# Altium PCB ATLAS_XP2V6.PcbDoc (part 1 of 4)
Units mil, origin at the board's own origin, x right, y up, seen from the top; angles counter-clockwise.
Board outline 6380 x 9190 mil, 4 copper layers (Primary Component Side, Ground Plane, Power Plane, Secondary Component Side), stack 35.4 mil thick; 203 components, 228 nets, 1212 pads, 912 vias.
Unrouted connection lines stored in the file: 522.
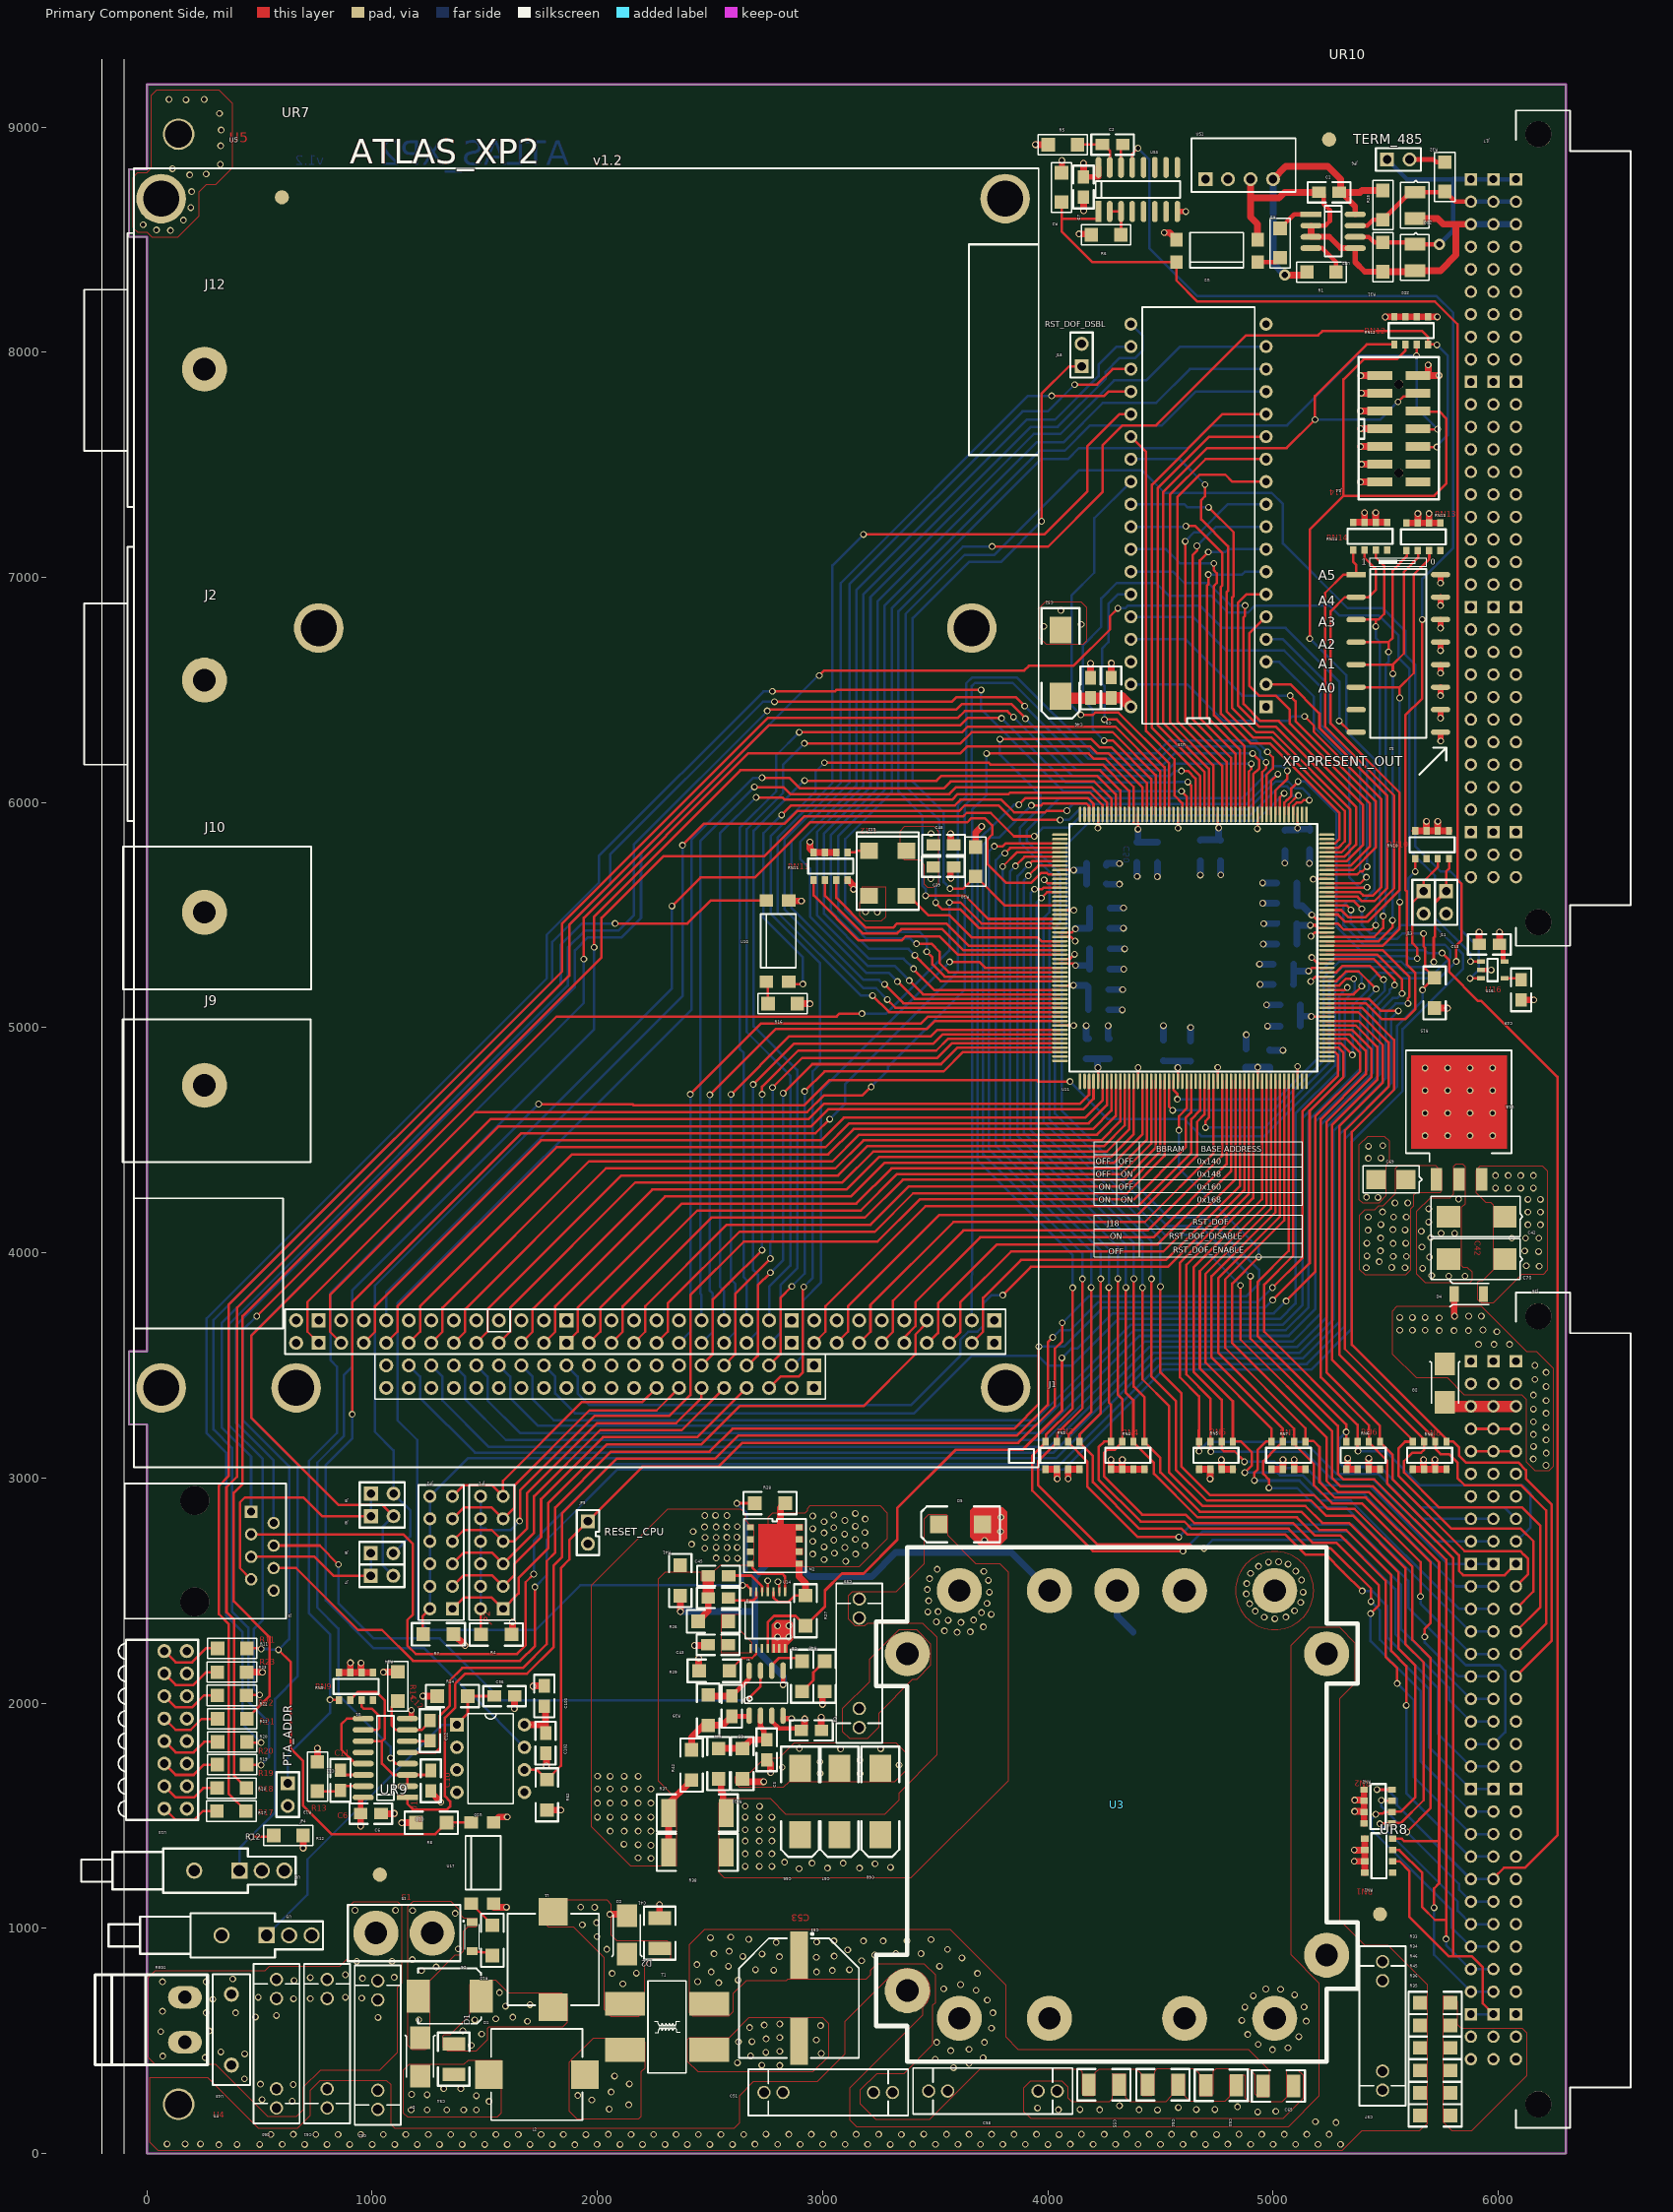
[diagram p0: Primary Component Side view]
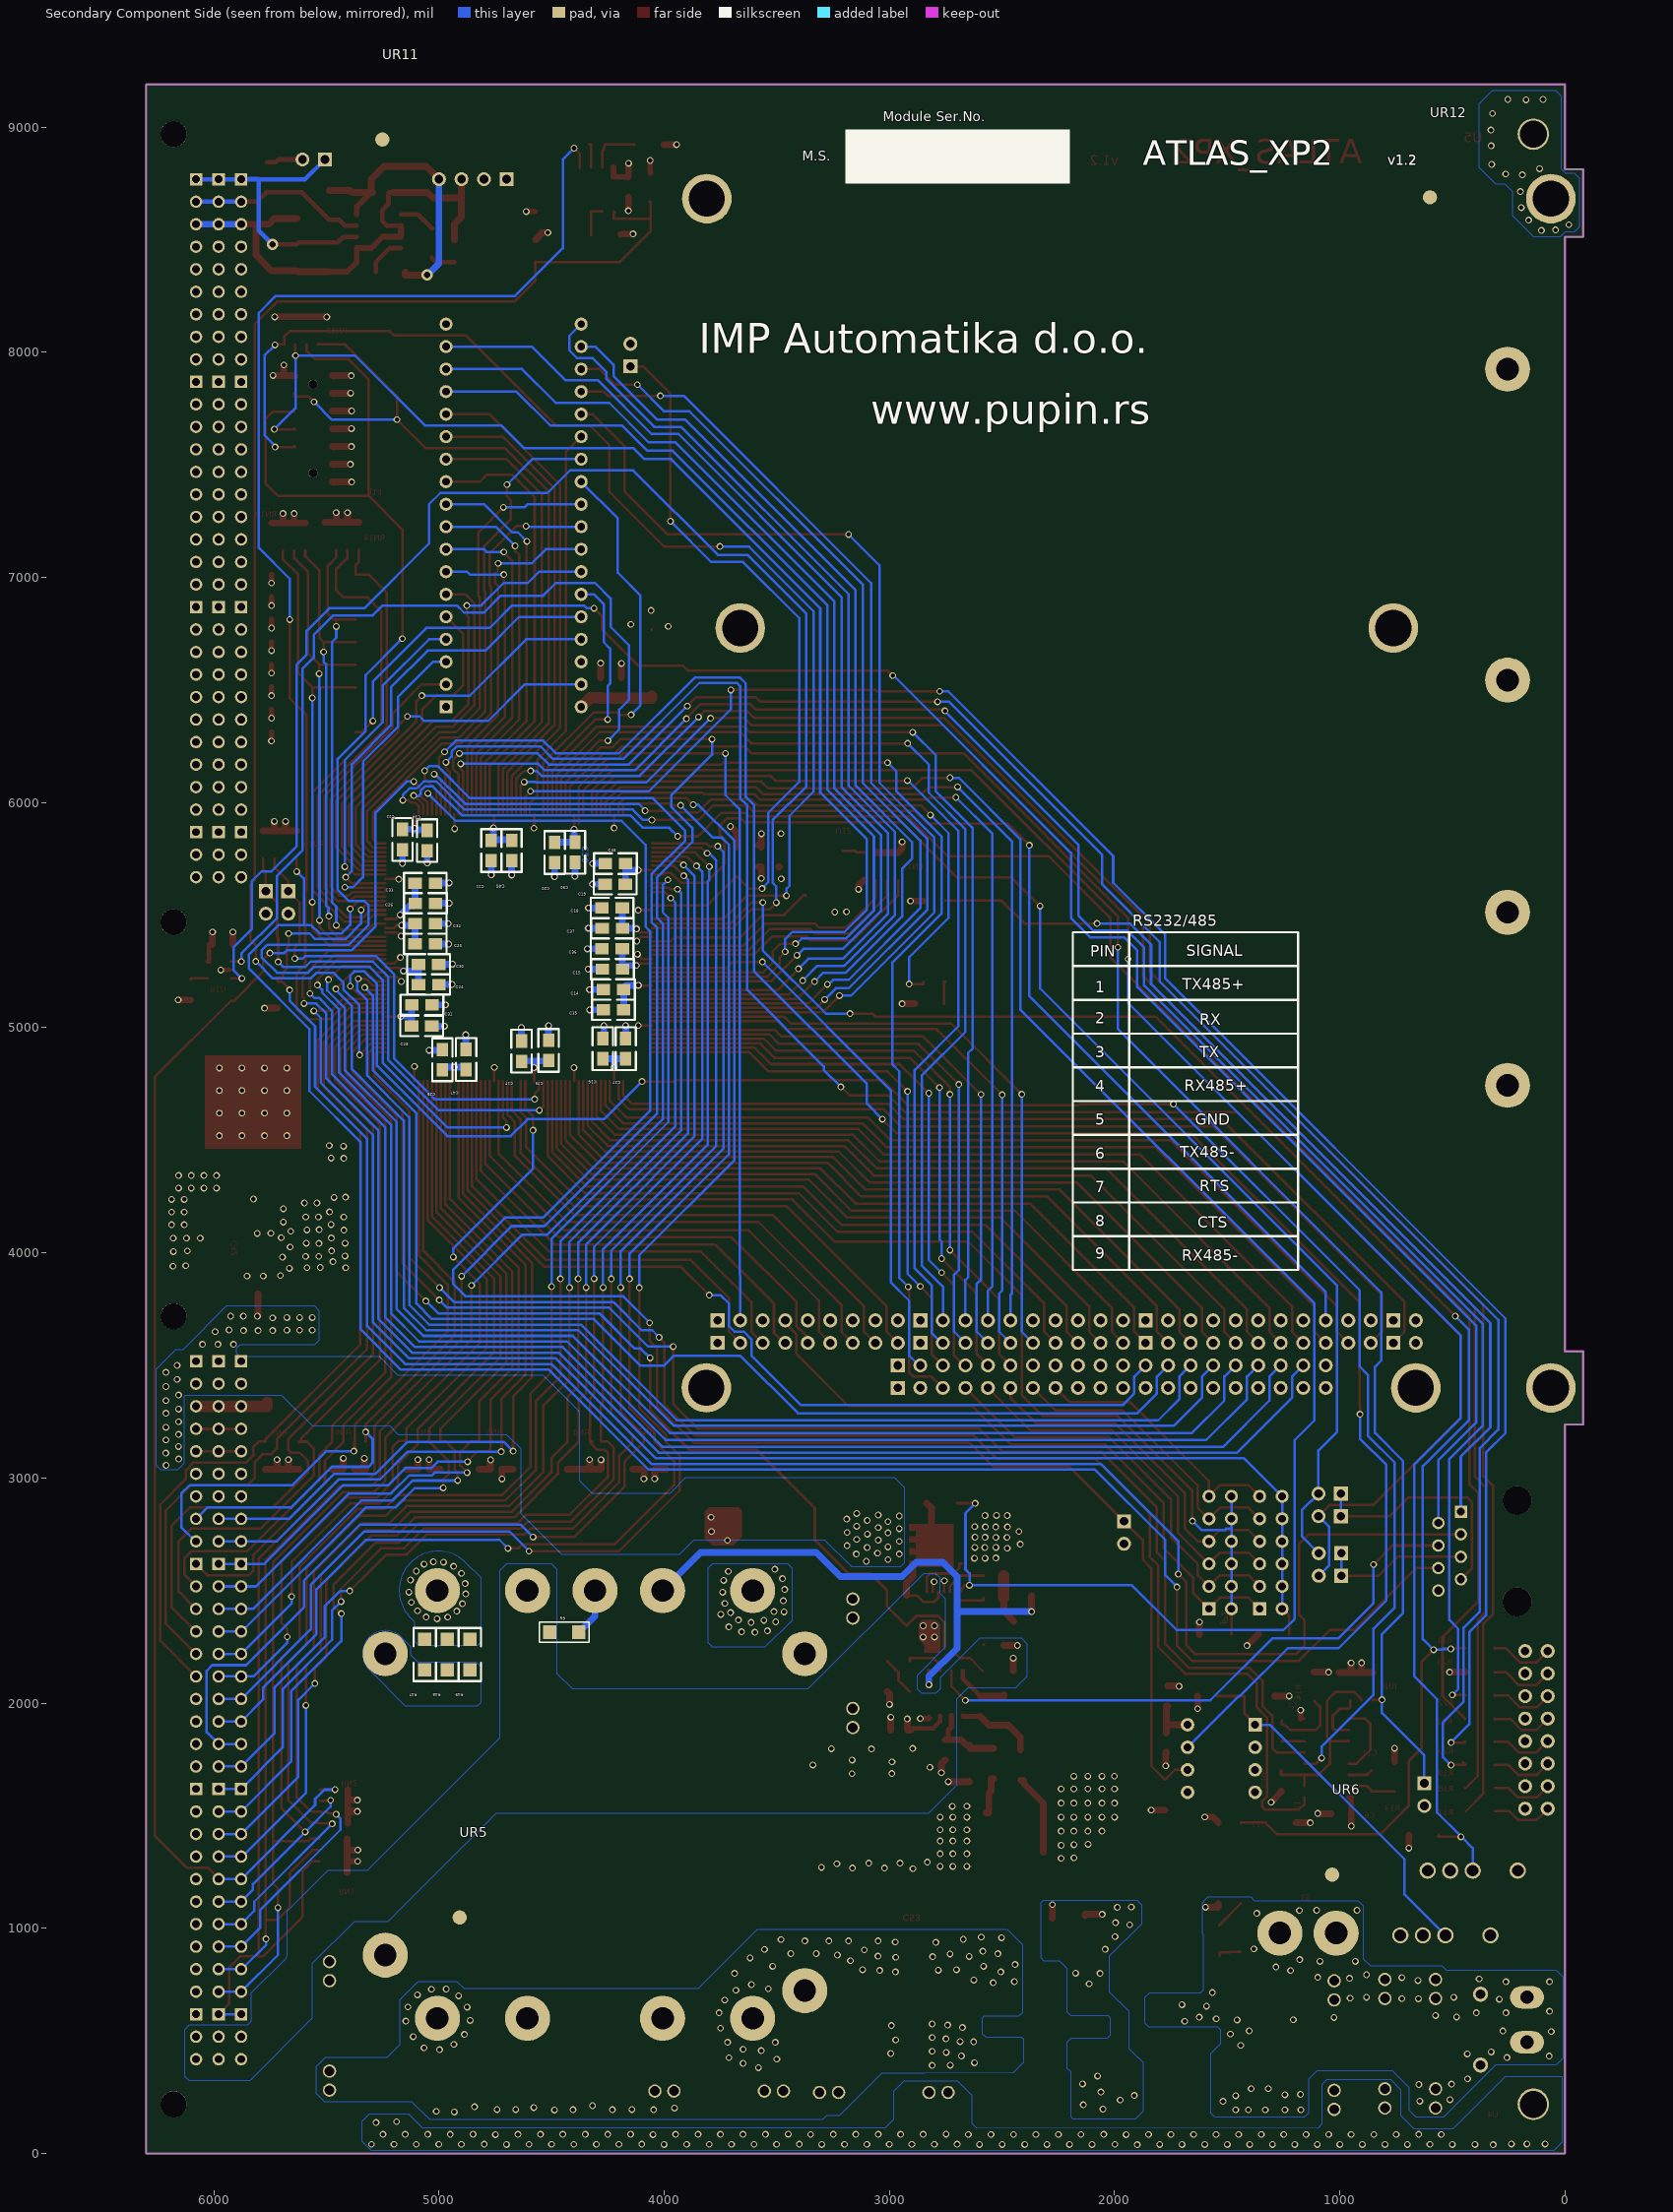
[diagram p1: Secondary Component Side view, seen from below]
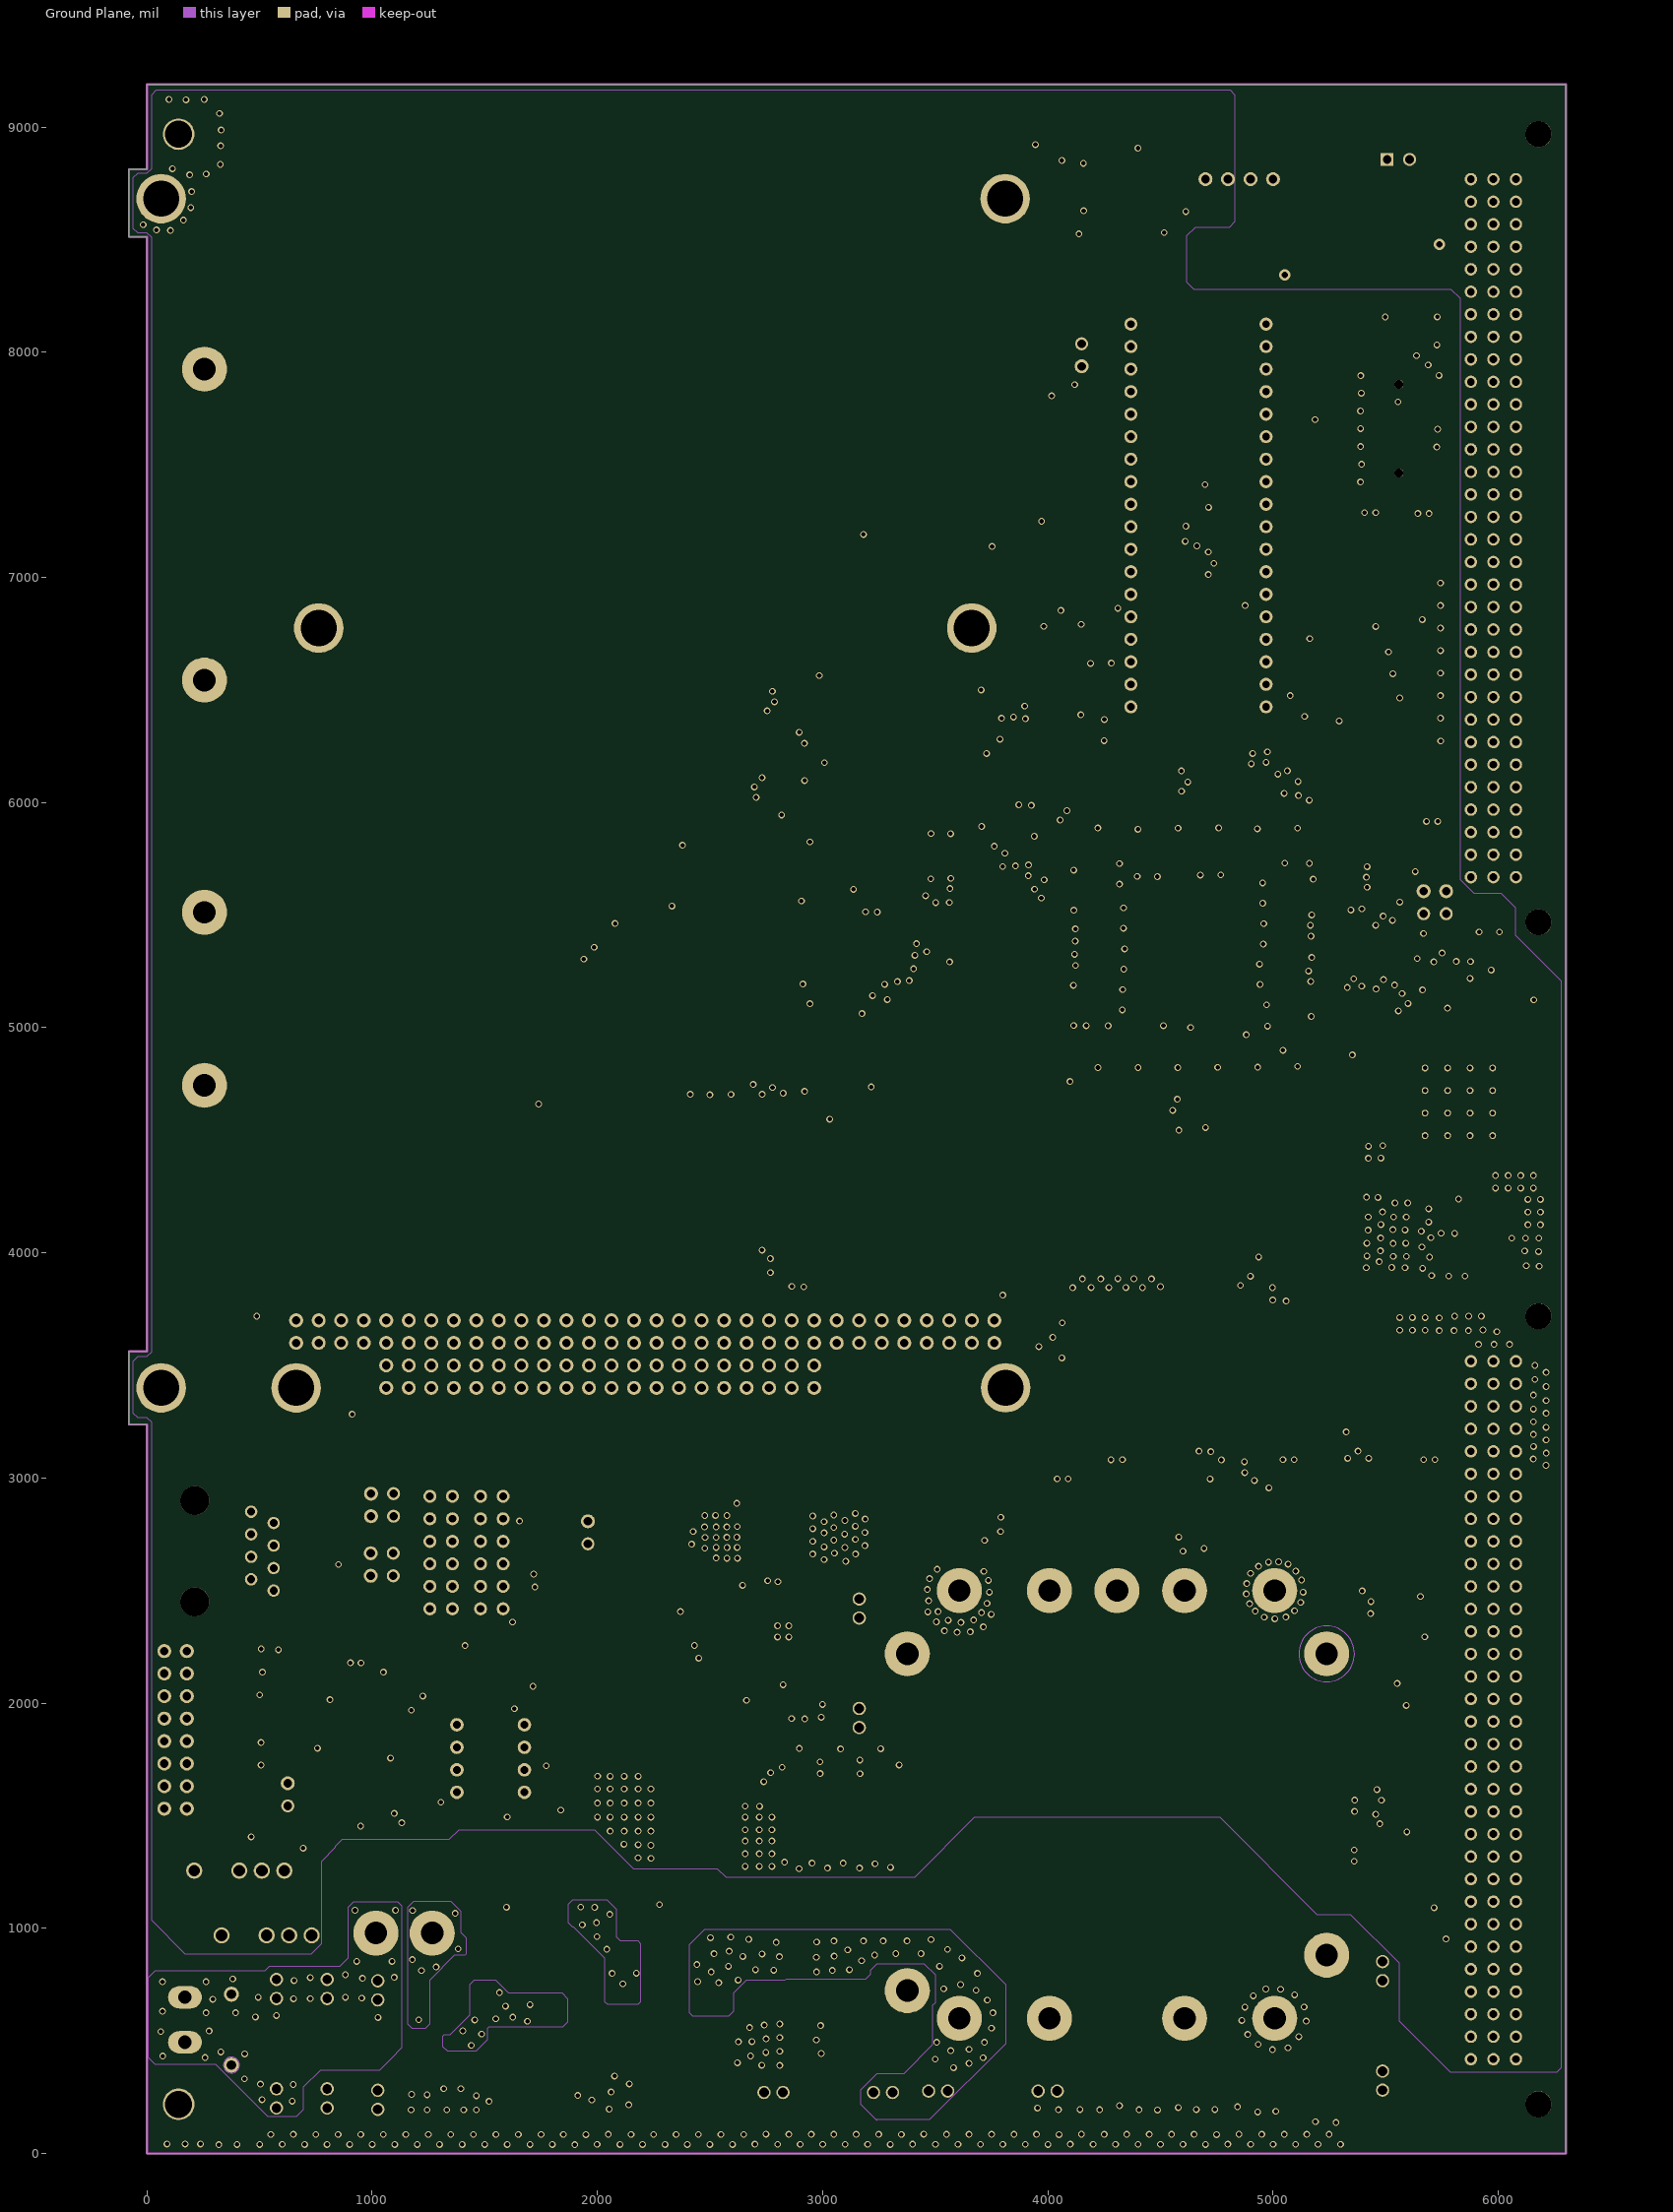
[diagram p2: Ground Plane]
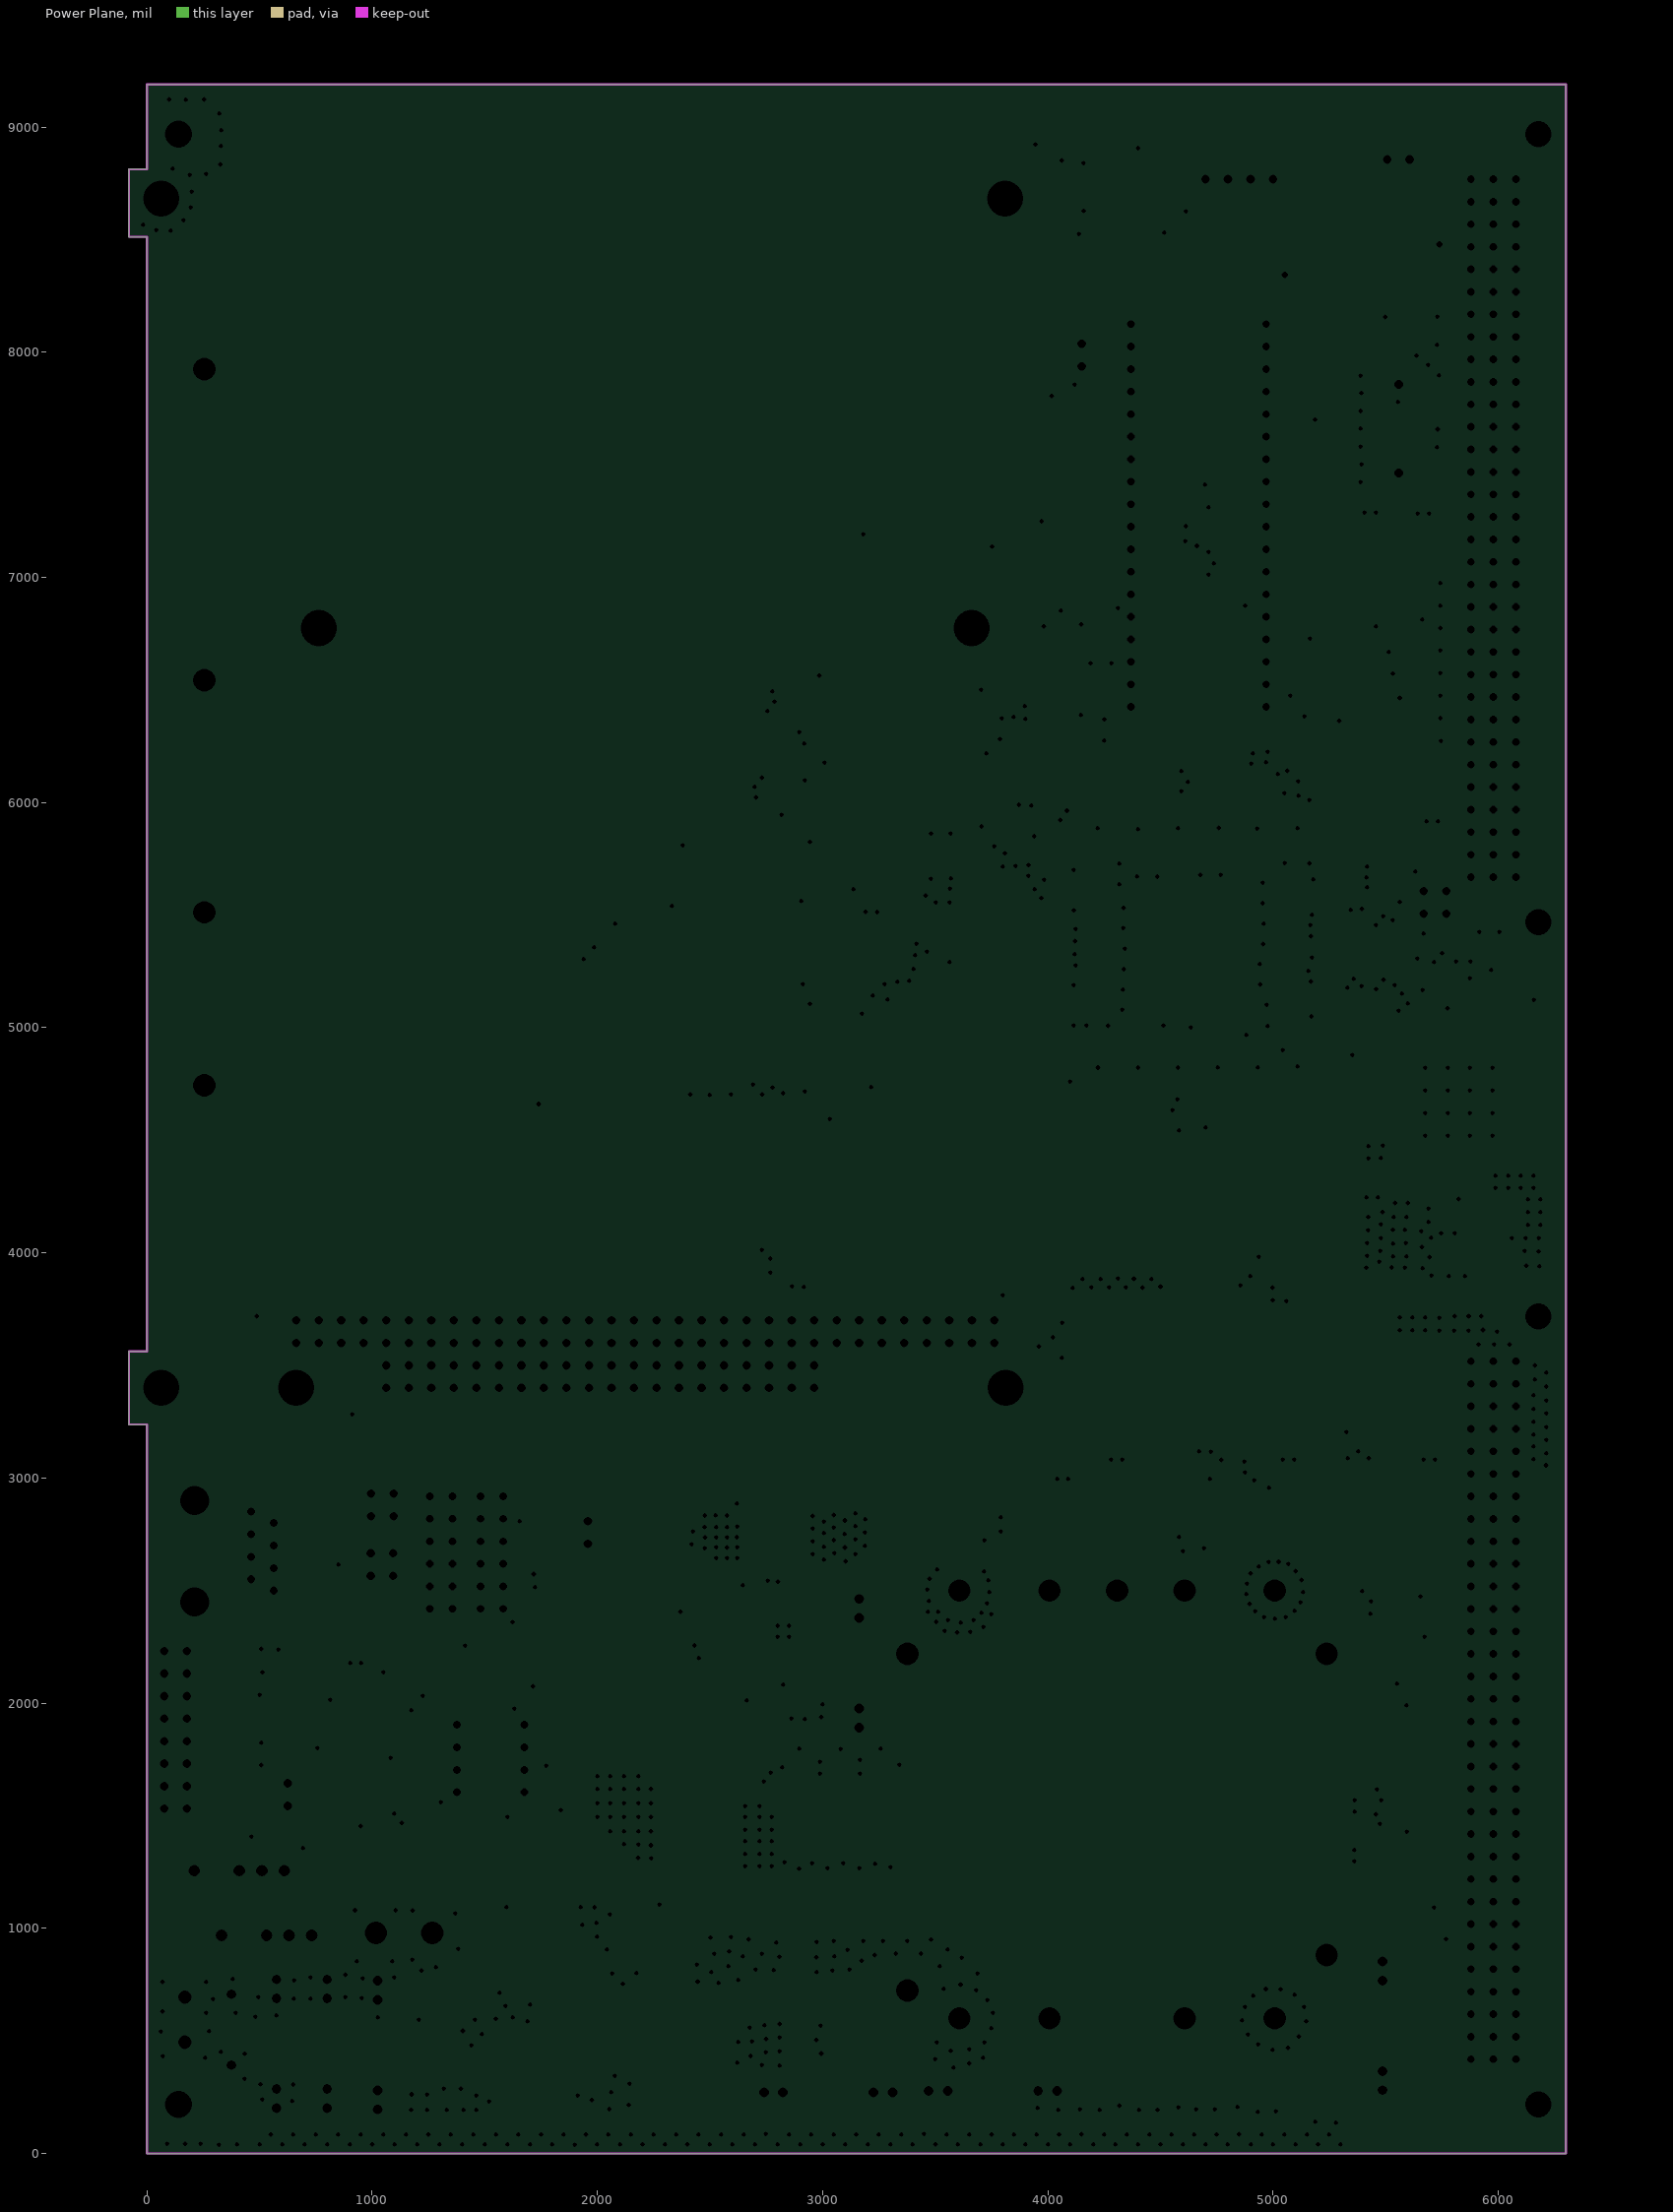
[diagram p3: Power Plane, clearances drawn from the general rule]

## Layer stack, top to bottom
Solder Mask Top: solder mask 0.4, Solder Resist, Dk 3.5
Primary Component Side: signal copper 1.35
Dielectric 1: dielectric 10, FR-4, Dk 4.3
Ground Plane: signal copper 1.35
Dielectric2: dielectric 10, FR-4, Dk 4.3
Power Plane: plane copper 1.35
Dielectric3: dielectric 10, FR-4, Dk 4.3
Secondary Component Side: signal copper 1.35
Solder Mask Bottom: solder mask 0.4, Solder Resist, Dk 3.5

## Board outline
6300,0 6300,9190 0,9190 0,8812.5 -80,8812.5 -80,8512.5 0,8512.5 0,3562.5 -80,3562.5 -80,3237.5 0,3237.5 0,0

## Design rules (kind name [scope] priority, off if disabled: settings)
Clearance "Clearance - Net - VICOR_+IN" [InNet('VICOR_+IN') OR InNet('+24VDC_DIODE') OR InNet('VICOR_-IN') OR InNet('+24VDC_SW') OR InNet('GND_24VDC') OR InNet('+24VDC') OR InNet('+24VDC_CMCHK') OR InNet('GND_24V_CMCHK')] p1: gap=12 ignorepadtopadclearanceinfootprint=FALSE except(0: Arc-Hole Track-Hole SMDPad-Hole THPad-Hole Via-Hole Fill-Hole Poly-Hole Region-Hole Text-Hole; 10: Text-Text)
Clearance "Clearance - Net - VICOR_+IN- SMD" [InNet('VICOR_+IN') OR InNet('+24VDC_DIODE') OR InNet('VICOR_-IN') OR InNet('+24VDC_SW') OR InNet('GND_24VDC') OR InNet('+24VDC') OR InNet('+24VDC_CMCHK') OR InNet('GND_24V_CMCHK') AND IsVia vs IsSMTPin] p2: gap=12 ignorepadtopadclearanceinfootprint=FALSE
Clearance "Clearance - Net - VICOR_+IN - Via" [( InNet('VICOR_+IN') OR InNet('+24VDC_DIODE') OR InNet('VICOR_-IN') OR InNet('+24VDC_SW') OR InNet('GND_24VDC') OR InNet('+24VDC') OR InNet('+24VDC_CMCHK') OR InNet('GND_24V_CMCHK') ) And IsVia vs IsVia] p3: gap=12 ignorepadtopadclearanceinfootprint=FALSE
Clearance "Clearance - Default - DEFAULT- SMD" [IsVia vs IsSMTPin] p4: gap=10 ignorepadtopadclearanceinfootprint=FALSE
Clearance "Clearance - Default - DEFAULT - Via" [IsVia vs IsVia] p5: gap=10 ignorepadtopadclearanceinfootprint=FALSE
Clearance "Clearance - Default - DEFAULT - Net" [All] p6: gap=10 ignorepadtopadclearanceinfootprint=FALSE except(0: Arc-Hole Track-Hole SMDPad-Hole THPad-Hole Via-Hole Fill-Hole Poly-Hole Region-Hole Text-Hole; 6: Via-Fill Via-Poly Via-Region; 8: Arc-Arc Arc-Track Arc-SMDPad Track-Track Track-SMDPad THPad-THPad; 8.6: SMDPad-SMDPad)
ComponentClearance "ComponentClearance - Default - DEFAULT" [All] p1: gap=6 collisioncheckmode=3 verticalgap=10 showdistances=FALSE
FanoutControl Fanout_LCC [IsLCC] p1: bgadir=Out bgaviamode=Centered fanoutstyle=Auto fanoutdirection=Alternating viagrid=1 // Fanout_LCC (Default Rule)
FanoutControl Fanout_BGA [IsBGA] p2: bgadir=Out bgaviamode=Centered fanoutstyle=Auto fanoutdirection=Alternating viagrid=1 // Fanout_BGA (Default Rule)
HoleToHoleClearance "HoleToHoleClearance - Default - DEFAULT" [All] p1: gap=6 allowstackedmicrovias=TRUE
Length "Default Length" [All] p1: maxlimit=50000 minlimit=0
MaxMinImpedance "Default Impedance" [All] p1: minimum=50.00 maximum=150.0
ParallelSegment "Default Parallel Segment Same Layer" [All] p1: limit=1000 gap=200
ParallelSegment "Default Parallel Segment Adjasent" [All] p2: limit=1000 gap=200
PlaneClearance "PlaneClearance - FootPrint 'MTH_IZVLAKAC_PADS_COPPER_AREA_SIM_REV1'" [HasFootprint('MTH_IZVLAKAC_PADS_COPPER_AREA_SIM_REV1')] p1: clearance=5 // PAD - Power Plane Clearance
PlaneClearance "PlaneClearance - FootPrint 'MTH_IZVLAKAC_PADS'" [HasFootprint('MTH_IZVLAKAC_PADS')] p2: clearance=5 // PAD - Power Plane Clearance
PlaneClearance "PlaneClearance - FootPrint 'MOV10D470KA'" [HasFootprint('MOV10D470KA')] p3: clearance=18.46 // PAD - Power Plane Clearance
PlaneClearance "PlaneClearance - FootPrint 'MTH_IZVLAKAC_PADS_COPPER_AREA_TOP_BOT'" [HasFootprint('MTH_IZVLAKAC_PADS_COPPER_AREA_TOP_BOT')] p4: clearance=5 // PAD - Power Plane Clearance
PlaneClearance "PlaneClearance - FootPrint 'MTH_IZVLAKAC_PADS_COPPER_AREA_SIMETRICAN'" [HasFootprint('MTH_IZVLAKAC_PADS_COPPER_AREA_SIMETRICAN')] p5: clearance=5 // PAD - Power Plane Clearance
PlaneClearance "PlaneClearance - FootPrint 'MTH_IZVLAKAC_PADS_COPPER_AREA_SIM_REV2'" [HasFootprint('MTH_IZVLAKAC_PADS_COPPER_AREA_SIM_REV2')] p6: clearance=5 // PAD - Power Plane Clearance
PlaneClearance "PlaneClearance - FootPrint 'MOV10D470K'" [HasFootprint('MOV10D470K')] p7: clearance=11.81 // PAD - Power Plane Clearance
PlaneClearance "PlaneClearance - FootPrint 'MOV10D201K'" [HasFootprint('MOV10D201K')] p8: clearance=11.81 // PAD - Power Plane Clearance
PlaneConnect "PlaneConnect - FootPrint 'MOV10D201K'" [HasFootprint('MOV10D201K')] p1: planeconnectstyle=Relief reliefexpansion=3.94 reliefentries=4 reliefconductorwidth=9.84 reliefairgap=7.87
PlaneConnect "PlaneConnect - FootPrint 'MOV10D470K'" [HasFootprint('MOV10D470K')] p2: planeconnectstyle=Relief reliefexpansion=3.94 reliefentries=4 reliefconductorwidth=9.84 reliefairgap=7.87
PlaneConnect "PlaneConnect - FootPrint 'MOV10D201K'_3" [HasFootprint('MOV10D201K')] p3: planeconnectstyle=Relief reliefexpansion=3.94 reliefentries=4 reliefconductorwidth=9.84 reliefairgap=7.87
PlaneConnect "PlaneConnect - FootPrint 'MOV10D470KA'" [HasFootprint('MOV10D470KA')] p4: planeconnectstyle=Relief reliefexpansion=10.59 reliefentries=4 reliefconductorwidth=9.84 reliefairgap=7.87
PlaneConnect "Default PlaneConnect" [All] p5: planeconnectstyle=Direct reliefexpansion=20 reliefentries=4 reliefconductorwidth=10 reliefairgap=10
PolygonConnect "PolygonConnect - FootPrint 'MOV10D470KA'" [HasFootprint('MOV10D470KA')] p1: connectstyle=Relief reliefconductorwidth=9.84 reliefentries=4 polygonreliefangle="45 Angle" airgapwidth=7.87
PolygonConnect "PolygonConnect - FootPrint 'MOV10D201K'" [HasFootprint('MOV10D201K')] p2: connectstyle=Relief reliefconductorwidth=9.84 reliefentries=4 polygonreliefangle="45 Angle" airgapwidth=7.87
PolygonConnect "PolygonConnect - Default SMT" [IsSMTPin] p3: connectstyle=Direct reliefconductorwidth=10 reliefentries=4 polygonreliefangle="45 Angle" airgapwidth=10
PolygonConnect "PolygonConnect - FootPrint 'MOV10D201K'_2" [HasFootprint('MOV10D201K')] p4: connectstyle=Relief reliefconductorwidth=9.84 reliefentries=4 polygonreliefangle="45 Angle" airgapwidth=7.87
PolygonConnect "PolygonConnect - FootPrint 'MOV10D470K'" [HasFootprint('MOV10D470K')] p5: connectstyle=Relief reliefconductorwidth=9.84 reliefentries=4 polygonreliefangle="45 Angle" airgapwidth=7.87
PolygonConnect "PolygonConnect - Default Pad" [All] p6: connectstyle=Direct reliefconductorwidth=10 reliefentries=4 polygonreliefangle="45 Angle" airgapwidth=10
RoutingLayers "RoutingLayers - Default - DEFAULT" [All] p1: top layer_v5=TRUE mid layer 1_v5=TRUE bottom layer_v5=TRUE
RoutingPriority "RoutingPriority - Default - DEFAULT" [All] p1: routingpriority=3
RoutingTopology "Default Routing Topology" [All] p1: topology=Shortest
RoutingVias "RoutingVias - Default - DEFAULT" [All] p1: holewidth=20 width=30 viastyle="Through Hole" minholewidth=20 minwidth=30 maxholewidth=20 maxwidth=30
SMDToCorner "SMDToCorner - Net - VICOR_+IN" [InNet('VICOR_+IN') OR InNet('+24VDC_DIODE') OR InNet('VICOR_-IN') OR InNet('+24VDC_SW') OR InNet('GND_24VDC') OR InNet('+24VDC') OR InNet('+24VDC_CMCHK') OR InNet('GND_24V_CMCHK')] p1: distance=120000
SMDToCorner "SMDToCorner - Default - DEFAULT" [All] p2: distance=100000
SolderMaskExpansion [All] p1: expansion=4
Width "Width - Net - VICOR_+IN" [InNet('VICOR_+IN') OR InNet('VICOR_-IN') OR InNet('GND_24VDC') OR InNet('+24VDC') OR InNet('+24VDC_CMCHK') OR InNet('GND_24V_CMCHK')] p1: maxlimit=60 minlimit=12 preferedwidth=12
Width "Default Width" [All] p2: maxlimit=60 minlimit=10 preferedwidth=12
20 further rules are at their usual default settings.

## Components (designator, comment, footprint, x,y, rotation, side; value= is the part's Value field where it differs from the comment)
C1 "0805" 0805 5249.13,8710.22 r180 top
C2 "0805" 0805 4287.46,8922.46 r180 top
C3 "0805" 0805 2752,1793.02 r270 top
C4 "0805" 0805 2949.92,1878.86 r0 top
C5 "0805" 0805 2596.77,1986.53 r270 top
C6 "0805" 0805 994.17,1509 r0 top
C7 "0805" 0805 4158.61,8734 r270 top
C8 "1206" 1206 2909,2119 r270 top
C9 "0805" 0805 4281.56,6509.86 r90 top
C10 "0805" 0805 1260.38,1655.45 r270 top
C11 "0805" 0805 859.06,1656.96 r270 top
C12 "0805" 0805 1256.61,1877.57 r90 top
C13 "0805" 0805 5960.7,5370 r180 top
C14 "0805" 0805 4225,5169.33 r0 bottom
C15 "0805" 0805 4229.68,5259.84 r0 bottom
C16 "0805" 0805 4272.64,4906.63 r90 bottom
C17 "0805" 0805 4633.41,4895.58 r90 bottom
C18 "0805" 0805 4231.14,5531.47 r0 bottom
C19 "0805" 0805 4217.46,5637.24 r0 bottom
C20 "0805" 0805 4486.34,5778.33 r270 bottom
C21 "0805" 0805 4767.54,5786.98 r270 bottom
C22 "0805" 0805 5161.76,5835.67 r270 bottom
C23 "0805" 0805 5061.02,5371.98 r180 bottom
C24 "0805" 0805 5045.55,5191.96 r180 bottom
C25 "0805" 0805 4513.3,4899.11 r90 bottom
C26 "0805" 0805 5060.57,5552.62 r180 bottom
C27 "0805" 0805 4170.72,4906.63 r90 bottom
C28 "0805" 0805 5076.42,5007.3 r180 bottom
C29 "0805" 0805 4984.87,4857.44 r90 bottom
C30 "0805" 0805 5046.28,5281.39 r180 bottom
C31 "0805" 0805 5075.96,5101.49 r180 bottom
C32 "0805" 0805 5061.02,5462.07 r180 bottom
C33 "0805" 0805 5061,5642.14 r180 bottom
C34 "0805" 0805 5052.55,5831.12 r270 bottom
C35 "0805" 0805 4225,5079.32 r0 bottom
C36 "0805" 0805 4231.09,5350.63 r0 bottom
C37 "0805" 0805 4230.23,5441.37 r0 bottom
C38 "0805" 0805 4216.75,5729.39 r0 bottom
C39 "0805" 0805 3536.5,5714.22 r0 top
C40 "0805" 0805 4677.44,5786.98 r270 bottom
C41 "1210" 1210 2277,978 r90 top
C42 "CASE_D_MILOS_PADS" CASE_D_MILOS_PADS 6029,4161 r180 top
C43 "0805" 0805 2535.94,2259.15 r180 top
C44 "0805" 0805 2537.12,2467.2 r0 top
C45 "0805" 0805 2537.73,2565.75 r0 top
C46 "0805" 0805 4189.71,6509.11 r90 top
C47 "0805" 0805 4879.44,4858.56 r90 bottom
C48 "0805" 0805 3537.22,5811.38 r0 top
C49 "0805" 0805 6101.69,5168.15 r270 top
C50 "0805" 0805 4395.79,5779.24 r270 bottom
C51 "Y_CAP_KEMET" Y_CAP_KEMET 3025,271 r180 top
C52 "7343" 7343 4056.25,6618.75 r270 top
C53 "CAPAE1350X1350L" CAPAE1350X1350L 2895,690 r270 top
C54 "1210" 1210 1362.5,418.75 r270 top
C55 "1210" 1210 4249,305 r0 top
C56 "0805" 0805 1587.5,2031.25 r0 top
C57 "Y_CAP_KEMET" Y_CAP_KEMET 5486.15,566.62 r90 top
C58 "Y_CAP_KEMET" Y_CAP_KEMET 3756,277 r0 top
C59 "Y_CAP_KEMET" Y_CAP_KEMET 3162.5,2177.17 r90 top
C60 "Y_CAP_KEMET" Y_CAP_KEMET 575,487.5 r270 top
C61 "Y_CAP_KEMET" Y_CAP_KEMET 800,487.5 r90 top
C62 "Y_CAP_KEMET" Y_CAP_KEMET 1025,481.25 r270 top
C63 "1210" 1210 4770,303 r0 top
C64 "1210" 1210 4511,305 r0 top
C65 "1210" 1210 5024,300 r0 top
C66 "7343" 7343 2900,1562.5 r270 top
C67 "7343" 7343 3075,1562.5 r270 top
C68 "7343" 7343 3256.25,1562.5 r270 top
C69 "CASE_B_MILOS_ORCAD" CASE_B_MILOS_ORCAD 5590,4326 r180 top
C70 "CASE_D_MILOS_PADS" CASE_D_MILOS_PADS 6029,3972 r180 top
C102 "0805" 0805 1769.99,1822.05 r270 top
C103 "0805" 0805 1764.13,2031.65 r90 top
D1 "SK86C" SK86C 1344,699 r180 top
D2 "SM$2F$DO214AC_21" SM$2F$DO214AC_21 2131.25,1056.25 r90 top
D3 "SM$2F$DO214AC_21" SM$2F$DO214AC_21 5763.41,3336.08 r270 top
D4 "BZV55-C3V3" BZV55-C3V3 5804,3818 r0 top
D5 "SMB" SMB 3612.5,2793.75 r180 top
D6 "SOD-123_ONSEMI" SOD-123_ONSEMI 1443.75,962.5 r270 top
D7 "SM$2F$DO214AC_21" SM$2F$DO214AC_21 1212.5,343.75 r270 top
J1 "WAFER_PADS_REV4" WAFER_PADS_REV4 662.5,3600 r0 top
J2 "VIKOR1_RUPA_BEZ_SST" VIKOR1_RUPA_BEZ_SST 256.25,6543.75 r0 top
J3 "TE_215877-1_REV1" TE_215877-1_REV1 462.5,2850 r90 top
J5 "JUMPER_100_PADS_MILOS" JUMPER_100_PADS_MILOS 994.82,2930.38 r270 top
J6 "JUMPER_100_PADS_MILOS" JUMPER_100_PADS_MILOS 993.65,2665.75 r270 top
J7 "JUMPER_100_PADS_MILOS" JUMPER_100_PADS_MILOS 993.65,2565.75 r270 top
J8 "JUMPER_100_PADS_MILOS" JUMPER_100_PADS_MILOS 994.82,2830.38 r270 top
J9 "VIKOR1_RUPA_BEZ_SST" VIKOR1_RUPA_BEZ_SST 256.25,4743.75 r0 top
J10 "VIKOR1_RUPA_BEZ_SST" VIKOR1_RUPA_BEZ_SST 256.25,5512.5 r0 top
J11 "JUMPER_100_PADS_MILOS" JUMPER_100_PADS_MILOS 5768.75,5606.25 r180 top
J12 "VIKOR1_RUPA_BEZ_SST" VIKOR1_RUPA_BEZ_SST 256.25,7925 r0 top
J13 "JUMPER_100_PADS_MILOS" JUMPER_100_PADS_MILOS 5668.75,5606.25 r180 top
J14 "JTAG_SMD_PADS" JTAG_SMD_PADS 5559,7660 r270 top
J16 "DIN96_ABC$2F$R_PADS_MILOS" DIN96_ABC$2F$R_PADS_MILOS 6078.5,3518.5 r270 top
J17 "DIN96_ABC$2F$R_PADS_MILOS" DIN96_ABC$2F$R_PADS_MILOS 6078.5,8768.5 r270 top
J18 "JUMPER_100_PADS_MILOS" JUMPER_100_PADS_MILOS 4150,7937.5 r0 top
JP1 "BLKCON.100$2F$VH$2F$TM2OE$2F$W.200$2F$12_PADS_REV2" BLKCON.100$2F$VH$2F$TM2OE$2F$W.200$2F$12_PADS_REV2 1581.25,2418.75 r90 top
JP2 "BLKCON.100$2F$VH$2F$TM2OE$2F$W.200$2F$12_PADS_REV2" BLKCON.100$2F$VH$2F$TM2OE$2F$W.200$2F$12_PADS_REV2 1356.25,2418.75 r90 top
JP4 "JUMPER_100_PADS_MILOS" JUMPER_100_PADS_MILOS 625,1643.75 r180 top
JP5 "JUMPER_100_IDIOT_PADS_MILOS" JUMPER_100_IDIOT_PADS_MILOS 1958.06,2807.76 r180 top
JP6 "JUMPER_100_J3" JUMPER_100_J3 5506.25,8856.25 r270 top
L1 "IHLP" IHLP 1803.9,861.5 r90 top
L2 "IHLP" IHLP 1731.25,350 r0 top
M2 "CSD16403Q5A_REV2" CSD16403Q5A_REV2 2787.5,2700 r0 top
R1 "SM$2F$R_1206" SM$2F$R_1206 5150,8356.25 r0 top
R2 "SM$2F$R_1206" SM$2F$R_1206 4061.04,8796.73 r270 top
R3 "SM$2F$R_1206" SM$2F$R_1206 5031.25,8550 r270 top
R4 "1206" 1206 1551.23,2304.98 r180 top
R5 "SM$2F$R_1206" SM$2F$R_1206 4001.38,8921.28 r0 top
R6 "SM$2F$R_1206" SM$2F$R_1206 4193.56,8521.91 r0 top
R7 "1206" 1206 1293.75,2306.25 r180 top
R8 "1206" 1206 1262.5,1468.75 r0 top
R9 "SM$2F$R_1206" SM$2F$R_1206 4378.88,2315.09 r0 bottom
R10 "1206" 1206 1533.68,946.27 r270 top
R11 "SM$2F$R_1206" SM$2F$R_1206 313.53,2243.38 r0 top
R12 "SM$2F$R_1206" SM$2F$R_1206 562.5,1412.5 r0 top
R13 "SM$2F$R_1206" SM$2F$R_1206 756.68,1738.9 r270 top
R14 "SM$2F$R_1206" SM$2F$R_1206 1113.71,2139.48 r270 top
R15 "1206" 1206 5717.18,5154.56 r270 top
R16 "SM$2F$R_1206" SM$2F$R_1206 2887.4,5106.71 r180 top
R17 "SM$2F$R_1206" SM$2F$R_1206 439.8,1520.57 r180 top
R18 "SM$2F$R_1206" SM$2F$R_1206 441.31,1622.97 r180 top
R19 "SM$2F$R_1206" SM$2F$R_1206 442.81,1726.87 r180 top
R20 "SM$2F$R_1206" SM$2F$R_1206 443.57,1827.77 r180 top
R21 "SM$2F$R_1206" SM$2F$R_1206 443.57,1930.17 r180 top
R22 "SM$2F$R_1206" SM$2F$R_1206 442.01,2034.22 r180 top
R23 "SM$2F$R_1206" SM$2F$R_1206 312.5,2137.5 r0 top
R24 "1206" 1206 1356.25,2031.25 r180 top
R25 "SM$2F$R_1206" SM$2F$R_1206 5487.5,8718.75 r270 top
R26 "1206" 1206 2514.66,2363.17 r0 top
R27 "1206" 1206 2924.02,2410.77 r270 top
R28 "1206" 1206 2766.65,2888.41 r180 top
R29 "1206" 1206 2518.75,2143.75 r0 top
R30 "SM$2F$R_1206" SM$2F$R_1206 3679.37,5672.47 r90 top
R31 "SM$2F$R_1206" SM$2F$R_1206 5487.5,8487.5 r270 top
R32 "SM$2F$R_1206" SM$2F$R_1206 5762.5,8843.75 r270 top
R33 "1206" 1206 5720,668.75 r0 top
R34 "1206" 1206 5720,568.75 r0 top
R35 "1206" 1206 5720,168.75 r0 top
R36 "1206" 1206 5720,268.75 r0 top
R37 "2512" 2512 2443.75,1512.5 r0 top
R38 "2512" 2512 2443.75,1337.5 r0 top
R39 "1206" 1206 2491.56,1968.8 r270 top
R40 "1206" 1206 3009,2119 r90 top
R41 "1206" 1206 2368.06,2544.66 r270 top
R42 "1206" 1206 2418.38,1725.3 r270 top
R43 "1206" 1206 2643.75,1731.25 r90 top
R44 "1206" 1206 2537.5,1731.25 r270 top
R45 "1206" 1206 5720,368.75 r0 top
R46 "1206" 1206 5720,468.75 r0 top
R47 "1206" 1206 5063,2216 r90 bottom
R48 "1206" 1206 4963,2216 r90 bottom
R49 "1206" 1206 4863,2216 r90 bottom
R62 "1206" 1206 1775.84,1592.54 r270 top
REG1 "REG2_REV8_REG1" REG2_REV8_REG1 168.75,693.75 r0 top
RN1 "RX4_2512" RX4_2512 5469.39,1322.6 r270 top
RN2 "RX4_2512" RX4_2512 5465.98,1541.02 r270 top
RN3 "RX4_2512" RX4_2512 4065,3100 r0 top
RN4 "RX4_2512" RX4_2512 4354.71,3100 r0 top
RN5 "RX4_2512" RX4_2512 4746.31,3100 r0 top
RN6 "RX4_2512" RX4_2512 5399.85,3100 r0 top
RN7 "RX4_2512" RX4_2512 5068.56,3100 r0 top
RN8 "RX4_2512" RX4_2512 5694.95,3100 r0 top
RN9 "RX4_2512" RX4_2512 928.28,2074.89 r180 top
RN10 "RX4_2512" RX4_2512 5706.25,5812.5 r180 top
RN11 "RX4_2512" RX4_2512 3035.61,5717.08 r0 top
RN12 "RX4_2512" RX4_2512 5613.65,8096.06 r180 top
RN13 "RX4_2512" RX4_2512 5667.78,7180.22 r180 top
RN14 "RX4_2512" RX4_2512 5431.35,7182.58 r180 top
S1 "SW12V_PADS_REV1" SW12V_PADS_REV1 1141.46,978.75 r0 top
S2 "SMD_DIPSW_100" SMD_DIPSW_100 5368.75,7012.5 r270 top
T1 "VISHAY_CMCHK_ICM4743" VISHAY_CMCHK_ICM4743 2309,562 r0 top
U1 "SOG.050$2F$16$2F$WG.244$2F$L.375" SOG.050$2F$16$2F$WG.244$2F$L.375 1156.25,1581.25 r90 top
U2 "LTV814S" LTV814S 4931.25,8400 r90 top
U3 "VIKOR1_PE_PIN_REV1" VIKOR1_PE_PIN_REV1 4307.09,1550 r180 top
U4 "MTH_IZVLAKAC_PADS" MTH_IZVLAKAC_PADS 140.55,218.5 r0 top
U5 "MTH_IZVLAKAC_PADS" MTH_IZVLAKAC_PADS 140.55,8968.5 r0 top
U6 "SO8-OPT_MILOS" SO8-OPT_MILOS 2749.26,2044.45 r0 top
U8 "TP33WW080-SPST_PADS" TP33WW080-SPST_PADS 410,1256.25 r90 top
U9 "TP33WW080-SPST_PADS" TP33WW080-SPST_PADS 531.25,968.75 r90 top
U10 "LTV814S" LTV814S 2749.89,5204.69 r0 top
U11 "QUAD.50M$2F$208$2F$WG30.60_U11" QUAD.50M$2F$208$2F$WG30.60_U11 4143.75,4762.5 r0 top
U12 "CLK_GEN33_PADS" CLK_GEN33_PADS 3288.62,5685.65 r270 top
U13 "LED_8_REV3_PADS" LED_8_REV3_PADS 127,2081.25 r90 top
U14 "TPS2410_PADS" TPS2410_PADS 2756.25,2368.75 r180 top
U15 "DIP.100$2F$36$2F$W.600$2F$L1.850_PADS_REV1" DIP.100$2F$36$2F$W.600$2F$L1.850_PADS_REV1 4968.75,6425 r90 top
U16 "SOT23_5_MILOS_REV5" SOT23_5_MILOS_REV5 5975,5256.25 r0 top
U17 "LTV814S" LTV814S 1439.48,1109.51 r0 top
U18 "LM3940" LM3940 5826,4498 r90 top
U20 "DIP8" DIP8 1375.98,1903.97 r270 top
U45 "MOV10D470K" MOV10D470K 375,550 r270 top
UR5 "FIDUCIAL_R_TOP" FIDUCIAL_R_TOP 4908,1048 r180 bottom
UR6 "FIDUCIAL_R_TOP" FIDUCIAL_R_TOP 1034,1238 r180 bottom
UR7 "FIDUCIAL_R_TOP" FIDUCIAL_R_TOP 599,8688 r0 top
UR8 "FIDUCIAL_R_TOP" FIDUCIAL_R_TOP 5475,1062.5 r0 top
UR9 "FIDUCIAL_R_TOP" FIDUCIAL_R_TOP 1034,1238 r0 top
UR10 "FIDUCIAL_R_TOP" FIDUCIAL_R_TOP 5249,8945 r0 top
UR11 "FIDUCIAL_R_TOP" FIDUCIAL_R_TOP 5251,8945 r180 bottom
UR12 "FIDUCIAL_R_TOP" FIDUCIAL_R_TOP 600,8688 r180 bottom
US1 "DCDC55_PADS_MILOS" DCDC55_PADS_MILOS 4700,8893.75 r0 top
US2 "SOG.050$2F$8$2F$WG.244$2F$L.225" SOG.050$2F$8$2F$WG.244$2F$L.225 5168.75,8612.5 r270 top
US3 "SOG.050$2F$16$2F$WG.244$2F$L.375" SOG.050$2F$16$2F$WG.244$2F$L.375 4225,8625 r0 top
ZD2 "SM$2F$D_1206_21" SM$2F$D_1206_21 5631.25,8362.5 r270 top
ZD3 "SM$2F$D_1206_21" SM$2F$D_1206_21 5631.25,8593.75 r270 top

## Footprints (in the part's own frame and the unit in brackets; to place one, negate y for a bottom-side part, rotate by r counter-clockwise, add the part's x,y. Pads: shape width x height; smd on the part's side, far side on the other; paste and mask are expansions set on the pad)
0805 [mil]
  rect 60x50 smd: 1(-45,0) 2(45,0)
  silkscreen extent -95,-45 95,45
1206 [mil]
  rect 60x60 smd: 1(-67.5,0) 2(67.5,0)
  silkscreen extent -118,-50 118,50
1210 [mil]
  rect 60x100 smd: 1(-67.5,0) 2(67.5,0)
  silkscreen extent -118,-70 118,70
2512 [mil]
  rect 65x125 smd: 1(-127.5,0) 2(127.5,0)
  silkscreen extent -180,-82 180,82
7343 [mil]
  rect 120x95 smd: 1(147.5,0) 2(-147.5,0)
  silkscreen extent -245,-85 245,85
BLKCON.100$2F$VH$2F$TM2OE$2F$W.200$2F$12_PADS_REV2 [mil]
  rect 58x58 / inner round 58 / far side rect 58x58 hole 34: 1(0,0)
  round 58 hole 34: 2(0,100) 3(100,0) 4(100,100) 5(200,0) 6(200,100) 7(300,0) 8(300,100) 9(400,0) 10(400,100) 11(500,0) 12(500,100)
  silkscreen extent -50,-50 550,150
BZV55-C3V3 [mil]
  rect 40x70 smd paste-2: 1(130,0) 2(0,0)
  silkscreen extent -19,-59 156,59
CAPAE1350X1350L [mm]
  rect 5.35x2 smd: 1(-4.85,0) 2(4.85,0)
  silkscreen extent -7.37,-6.75 6.75,6.75
CASE_B_MILOS_ORCAD [mil]
  rect 86x86 smd: 1(0,0) 2(132,0)
  silkscreen extent -72,-60 191,60
CASE_D_MILOS_PADS [mil]
  rect 104x96 smd: 1(0,0) 2(250,0)
  silkscreen extent -80,-90 328,90
CLK_GEN33_PADS [mil]
  rect 71x79 smd: 1(-100.39,-82.28) 2(99.61,-82.28) 3(99.61,82.72) 4(-100.39,82.72)
  silkscreen extent -182,-138 162,138
CSD16403Q5A_REV2 [mm]
  rect 0.8x0.7 smd: 1(-2.752,2.055) 2(-2.752,0.685) 3(-2.752,-0.685) 4(-2.752,-2.055) 5(2.752,-2.055) 6(2.752,-0.685) 7(2.752,0.685) 8(2.752,2.055)
  Primary Component Side region: 3.157,-2.408 -1.847,-2.408 -1.847,2.418 3.157,2.418 3.157,1.707 2.37,1.707 2.37,1.046 3.157,1.046 3.157,0.335 2.37,0.335 2.37,-0.325 3.157,-0.325 3.157,-1.036 2.37,-1.036 2.37,-1.697 3.157,-1.697 3.157,-2.408
  silkscreen extent -3.48,-3.02 3.51,3.02
DCDC55_PADS_MILOS [mil]
  rect 62x62 / inner round 62 / far side rect 62x62 hole 38: 1(0,-125)
  round 62 hole 38: 2(100,-125) 3(200,-125) 4(300,-125)
  silkscreen extent -62,-181 400,56
DIN96_ABC$2F$R_PADS_MILOS [mil]
  rect 55x55 / inner round 55 / far side rect 55x55 hole 34: A1(0,0) A10(900,0) A20(1900,0) A30(2900,0) B1(0,-100) B10(900,-100) B20(1900,-100) B30(2900,-100) C1(0,-200) C10(900,-200) C20(1900,-200) C30(2900,-200)
  round 55 hole 34: A2(100,0) A3(200,0) A4(300,0) A5(400,0) A6(500,0) A7(600,0) A8(700,0) A9(800,0) A11(1000,0) A12(1100,0) A13(1200,0) A14(1300,0) A15(1400,0) A16(1500,0) A17(1600,0) A18(1700,0) A19(1800,0) A21(2000,0) A22(2100,0) A23(2200,0) A24(2300,0) A25(2400,0) A26(2500,0) A27(2600,0) A28(2700,0) A29(2800,0) A31(3000,0) A32(3100,0) B2(100,-100) B3(200,-100) B4(300,-100) B5(400,-100) B6(500,-100) B7(600,-100) B8(700,-100) B9(800,-100) B11(1000,-100) B12(1100,-100) B13(1200,-100) B14(1300,-100) B15(1400,-100) B16(1500,-100) B17(1600,-100) B18(1700,-100) B19(1800,-100) B21(2000,-100) B22(2100,-100) B23(2200,-100) B24(2300,-100) B25(2400,-100) B26(2500,-100) B27(2600,-100) B28(2700,-100) B29(2800,-100) B31(3000,-100) B32(3100,-100) C2(100,-200) C3(200,-200) C4(300,-200) C5(400,-200) C6(500,-200) C7(600,-200) C8(700,-200) C9(800,-200) C11(1000,-200) C12(1100,-200) C13(1200,-200) C14(1300,-200) C15(1400,-200) C16(1500,-200) C17(1600,-200) C18(1700,-200) C19(1800,-200) C21(2000,-200) C22(2100,-200) C23(2200,-200) C24(2300,-200) C25(2400,-200) C26(2500,-200) C27(2600,-200) C28(2700,-200) C29(2800,-200) C31(3000,-200) C32(3100,-200)
  round 116 hole 116: HOLE1(-200,100) HOLE2(3300,100)
  silkscreen extent -305,0 3405,510
DIP8 [mil]
  rect 60x60 / inner round 60 / far side rect 60x60 hole 35: 1(0,0)
  round 60 hole 35: 2(100,0) 3(200,0) 4(300,0) 5(300,300) 6(200,300) 7(100,300) 8(0,300)
  silkscreen extent -50,50 350,250
DIP.100$2F$36$2F$W.600$2F$L1.850_PADS_REV1 [mil]
  rect 58x58 / inner round 58 / far side rect 58x58 hole 34: 1(0,0)
  round 58 hole 34: 2(100,0) 3(200,0) 4(300,0) 5(400,0) 6(500,0) 7(600,0) 8(700,0) 9(800,0) 10(900,0) 11(1000,0) 12(1100,0) 13(1200,0) 14(1300,0) 15(1400,0) 16(1500,0) 17(1600,0) 18(1700,0) 19(1700,600) 20(1600,600) 21(1500,600) 22(1400,600) 23(1300,600) 24(1200,600) 25(1100,600) 26(1000,600) 27(900,600) 28(800,600) 29(700,600) 30(600,600) 31(500,600) 32(400,600) 33(300,600) 34(200,600) 35(100,600) 36(0,600)
  silkscreen extent -75,50 1775,550
FIDUCIAL_R_TOP [mil]
  round 63 smd paste-31.5 mask+31.5: 1(0,0)
IHLP [mil]
  rect 122.99x127.99 smd: 1(-212.5,0) 2(212.5,0)
  silkscreen extent -203,-203 203,203
JTAG_SMD_PADS [mil]
  rect 40x110 smd: 1(-236.61,-85.04) 2(-236.61,84.96) 3(-157.91,-85.04) 4(-157.91,84.96) 5(-79.11,-85.04) 6(-79.11,84.96) 7(-0.4,-85.04) 8(-0.4,84.96) 9(78.39,-85.04) 10(78.39,84.96) 11(157.09,-85.04) 12(157.09,84.96) 13(235.82,-85.04) 14(235.82,84.96)
  round 40 hole 40 mask-20: 15(-197.61,-0.04) 16(196.39,-0.04)
  silkscreen extent -318,-179 313,177
JUMPER_100_IDIOT_PADS_MILOS [mil]
  rect 62x62 / inner round 62 / far side rect 62x62 hole 38 mask+2.5: 1(0,0)
  round 62 / inner round 58 / far side round 62 hole 38 mask+2.5: 2(0,100)
  silkscreen extent -50,-50 50,150
JUMPER_100_J3 [mil]
  rect 62x62 / inner rect 58x58 / far side rect 62x62 hole 38 mask+2.5: 1(0,0)
  round 62 / inner round 58 / far side round 62 hole 38 mask+2.5: 2(0,100)
  silkscreen extent -50,-50 50,150
JUMPER_100_PADS_MILOS [mil]
  rect 62x62 / inner round 62 / far side rect 62x62 hole 38 mask+2.5: 1(0,0)
  round 62 / inner round 58 / far side round 62 hole 38 mask+2.5: 2(0,100)
  silkscreen extent -50,-50 50,150
LED_8_REV3_PADS [mil]
  round 62 hole 38: 1(-550,-50) 2(-450,-50) 3(-350,-50) 4(-250,-50) 5(-150,-50) 6(-50,-50) 7(50,-50) 8(150,-50) 9(-550,50) 10(-450,50) 11(-350,50) 12(-250,50) 13(-150,50) 14(-50,50) 15(50,50) 16(150,50)
  silkscreen extent -600,-100 200,254
LM3940 [mil]
  rect 100x50 smd: 1(-171.26,100) 2(-171.26,0) 3(-171.26,-100)
  round 30 hole 20: 5(22.74,151) 7(122.74,151) 10(22.74,51) 12(222.74,151) 14(322.74,151) 21(22.74,-49) 23(22.74,-149) 25(122.74,51) 27(122.74,-49) 29(122.74,-149) 37(222.74,51) 39(222.74,-49) 41(222.74,-149) 49(322.74,51) 51(322.74,-49) 53(322.74,-149)
  Primary Component Side region: -34.26,-213 378.74,-213 378.74,213 -34.26,213 -34.26,-213
  silkscreen extent -93,-233 401,236
LTV814S [mil]
  rect 60x55 smd: 1(0,0) 2(100,0) 3(100,360) 4(0,360)
  silkscreen extent -25,62 131,300
MOV10D470K [mm]
  round 1.7 hole 1.1: 1(-4,0) 2(4,0)
  silkscreen extent -6.25,-2.1 6.25,2.1
MTH_IZVLAKAC_PADS [mil]
  round 140 hole 120: 1(0,0)
QUAD.50M$2F$208$2F$WG30.60_U11 [mil]
  rect 11x70 smd paste-3.5: 1(0,0) 10(177.3,0) 20(374.3,0) 30(571.3,0) 40(768.3,0) 50(965.3,0) 110(906.2,1184.7) 120(709.2,1184.7) 130(512.2,1184.7) 140(315.2,1184.7) 150(118.2,1184.7)
  oval 11x70 smd paste-3.5: 2(19.7,0) 3(39.4,0) 4(59.1,0) 5(78.8,0) 6(98.5,0) 7(118.2,0) 8(137.9,0) 9(157.6,0) 11(197,0) 12(216.7,0) 13(236.4,0) 14(256.1,0) 15(275.8,0) 16(295.5,0) 17(315.2,0) 18(334.9,0) 19(354.6,0) 21(394,0) 22(413.7,0) 23(433.4,0) 24(453.1,0) 25(472.8,0) 26(492.5,0) 27(512.2,0) 28(531.9,0) 29(551.6,0) 31(591,0) 32(610.7,0) 33(630.4,0) 34(650.1,0) 35(669.8,0) 36(689.5,0) 37(709.2,0) 38(728.9,0) 39(748.6,0) 41(788,0) 42(807.7,0) 43(827.4,0) 44(847.1,0) 45(866.8,0) 46(886.5,0) 47(906.2,0) 48(925.9,0) 49(945.6,0) 51(985,0) 52(1004.7,0) 105(1004.7,1184.7) 106(985,1184.7) 107(965.3,1184.7) 108(945.6,1184.7) 109(925.9,1184.7) 111(886.5,1184.7) 112(866.8,1184.7) 113(847.1,1184.7) 114(827.4,1184.7) 115(807.7,1184.7) 116(788,1184.7) 117(768.3,1184.7) 118(748.6,1184.7) 119(728.9,1184.7) 121(689.5,1184.7) 122(669.8,1184.7) 123(650.1,1184.7) 124(630.4,1184.7) 125(610.7,1184.7) 126(591,1184.7) 127(571.3,1184.7) 128(551.6,1184.7) 129(531.9,1184.7) 131(492.5,1184.7) 132(472.8,1184.7) 133(453.1,1184.7) 134(433.4,1184.7) 135(413.7,1184.7) 136(394,1184.7) 137(374.3,1184.7) 138(354.6,1184.7) 139(334.9,1184.7) 141(295.5,1184.7) 142(275.8,1184.7) 143(256.1,1184.7) 144(236.4,1184.7) 145(216.7,1184.7) 146(197,1184.7) 147(177.3,1184.7) 148(157.6,1184.7) 149(137.9,1184.7) 151(98.5,1184.7) 152(78.8,1184.7) 153(59.1,1184.7) 154(39.4,1184.7) 155(19.7,1184.7) 156(0,1184.7)
  oval 70x11 smd paste-3.5: 53(1094.7,90) 54(1094.7,109.7) 55(1094.7,129.4) 56(1094.7,149.1) 57(1094.7,168.8) 58(1094.7,188.5) 59(1094.7,208.2) 61(1094.7,247.6) 62(1094.7,267.3) 63(1094.7,287) 64(1094.7,306.7) 65(1094.7,326.4) 66(1094.7,346.1) 67(1094.7,365.8) 68(1094.7,385.5) 69(1094.7,405.2) 71(1094.7,444.6) 72(1094.7,464.3) 73(1094.7,484) 74(1094.7,503.7) 75(1094.7,523.4) 76(1094.7,543.1) 77(1094.7,562.8) 78(1094.7,582.5) 79(1094.7,602.2) 81(1094.7,641.6) 82(1094.7,661.3) 83(1094.7,681) 84(1094.7,700.7) 85(1094.7,720.4) 86(1094.7,740.1) 87(1094.7,759.8) 88(1094.7,779.5) 89(1094.7,799.2) 91(1094.7,838.6) 92(1094.7,858.3) 93(1094.7,878) 94(1094.7,897.7) 95(1094.7,917.4) 96(1094.7,937.1) 97(1094.7,956.8) 98(1094.7,976.5) 99(1094.7,996.2) 101(1094.7,1035.6) 102(1094.7,1055.3) 103(1094.7,1075) 104(1094.7,1094.7) 157(-90,1094.7) 158(-90,1075) 159(-90,1055.3) 161(-90,1015.9) 162(-90,996.2) 163(-90,976.5) 164(-90,956.8) 165(-90,937.1) 166(-90,917.4) 167(-90,897.7) 168(-90,878) 169(-90,858.3) 171(-90,818.9) 172(-90,799.2) 173(-90,779.5) 174(-90,759.8) 175(-90,740.1) 176(-90,720.4) 177(-90,700.7) 178(-90,681) 179(-90,661.3) 181(-90,621.9) 182(-90,602.2) 183(-90,582.5) 184(-90,562.8) 185(-90,543.1) 186(-90,523.4) 187(-90,503.7) 188(-90,484) 189(-90,464.3) 191(-90,424.9) 192(-90,405.2) 193(-90,385.5) 194(-90,365.8) 195(-90,346.1) 196(-90,326.4) 197(-90,306.7) 198(-90,287) 199(-90,267.3) 201(-90,227.9) 202(-90,208.2) 203(-90,188.5) 204(-90,168.8) 205(-90,149.1) 206(-90,129.4) 207(-90,109.7) 208(-90,90)
  rect 70x11 smd paste-3.5: 60(1094.7,227.9) 70(1094.7,424.9) 80(1094.7,621.9) 90(1094.7,818.9) 100(1094.7,1015.9) 160(-90,1035.6) 170(-90,838.6) 180(-90,641.6) 190(-90,444.6) 200(-90,247.6)
  silkscreen extent -48,42 1052,1142
REG2_REV8_REG1 [mil]
  oval 150x100 hole 60 mask+2.5: 1(0,0) 2(0,-200)
  silkscreen extent -400,-300 100,100
RX4_2512 [mil]
  rect 28x34 smd: 1(-74.8,-61.6) 2(-24.8,-61.6) 3(25.2,-61.6) 4(75.2,-61.6) 5(75.2,61.4) 6(25.2,61.4) 7(-24.8,61.4) 8(-74.8,61.4)
  silkscreen extent -100,-33 100,34
SK86C [mil]
  rect 102x146 smd: 1(-140,0) 2(140,0)
  silkscreen extent -140,-123 141,123
SM$2F$D_1206_21 [mil]
  rect 56x92 smd: 1(0,0) 2(-117,0)
  silkscreen extent -169,-65 43,63
SM$2F$DO214AC_21 [mil]
  rect 100x90 smd: 1(0,0) 2(-170,0)
  silkscreen extent -182,-68 5,67
SM$2F$R_1206 [mil]
  rect 60x60 smd: 1(0,0) 2(130,0)
  silkscreen extent -45,-45 175,45
SMB [mil]
  rect 75x80 smd: 1(97.5,0) 2(-97.5,0)
  silkscreen extent -175,-80 175,80
SMD_DIPSW_100 [mil]
  rect 24x86 smd: 1(0,0)
  oval 24x86 smd: 2(100,0) 3(200,0) 4(300,0) 5(400,0) 6(500,0) 7(600,0) 8(700,0) 9(700,375) 10(600,375) 11(500,375) 12(400,375) 13(300,375) 14(200,375) 15(100,375) 16(0,375)
  silkscreen extent -25,62 725,313
SO8-OPT_MILOS [mil]
  oval 24x74 smd: 1(-75,-100) 2(-25,-100) 3(25,-100) 4(75,-100) 5(75,100) 6(25,100) 7(-25,100) 8(-75,100)
  silkscreen extent -95,-44 95,46
SOD-123_ONSEMI [mm]
  rect 0.91x1.22 smd: 1(-1.637,0) 2(1.637,0)
  silkscreen extent -1.78,-0.96 1.43,0.8
SOG.050$2F$8$2F$WG.244$2F$L.225 [mil]
  rect 25x94 smd: 1(0,0)
  oval 25x94 smd: 2(50,0) 3(100,0) 4(150,0) 5(150,196) 6(100,196) 7(50,196) 8(0,196)
  silkscreen extent -38,60 188,136
SOG.050$2F$16$2F$WG.244$2F$L.375 [mil]
  rect 25x94 smd: 1(0,0)
  oval 25x94 smd: 2(50,0) 3(100,0) 4(150,0) 5(200,0) 6(250,0) 7(300,0) 8(350,0) 9(350,196) 10(300,196) 11(250,196) 12(200,196) 13(150,196) 14(100,196) 15(50,196) 16(0,196)
  silkscreen extent -13,60 362,136
SOT23_5_MILOS_REV5 [mil]
  rect 35x20 smd paste-1.5: 1(-52.24,37.4) 2(-52.24,0) 3(-52.24,-37.4) 4(52.76,-37.4) 5(52.76,37.4)
  silkscreen extent -23,-50 22,50
SW12V_PADS_REV1 [mil]
  round 200 hole 100 mask+5: 1(-125,0) 2(125,0)
  silkscreen extent -250,-125 250,125
TE_215877-1_REV1 [mil]
  rect 55x55 / inner round 55 / far side rect 55x55 hole 35.43: 1(0,0)
  round 55 hole 35.43: 2(-50,-100) 3(-100,0) 4(-150,-100) 5(-200,0) 6(-250,-100) 7(-300,0) 8(-350,-100)
  round 128 hole 128: MTH1(50,250) MTH2(-400,250)
  silkscreen extent -475,-155 125,561
TP33WW080-SPST_PADS [mil]
  rect 72x72 / inner round 72 / far side round 72 hole 52 mask+2.5: 1(0,0)
  round 72 hole 52 mask+2.5: 2(0,-100) 3(0,-200) 4(0,200)
  silkscreen extent -98,-250 98,702
TPS2410_PADS [mil]
  rect 9.83x39.37 smd paste-1.68: 1(76.53,126) 2(50.95,126) 3(25.35,126) 4(-0.23,126) 5(-26.62,126) 6(-51,126) 7(-77,126) 8(-77,-125.52) 9(-51.42,-125.52) 10(-25.83,-125.52) 11(-0.23,-125.52) 12(24.97,-125.52) 13(51.33,-125.52) 14(76.53,-125.52)
  silkscreen extent -101,-80 100,83
VIKOR1_PE_PIN_REV1 [mm]
  round 5.08 hole 2.54 mask+0.127: 1(17.78,24.13) 2(7.62,24.13) 3(-7.62,24.13) 4(-17.78,24.13) 5(17.78,-24.13) 6(7.62,-24.13) 7(0,-24.13) 8(-7.62,-24.13) 9(-17.78,-24.13) PE10(23.65,21) PE11(23.65,-17) PE12(-23.65,-17) PE13(-23.65,17)
  silkscreen extent -27.16,-29 27.16,29
VIKOR1_RUPA_BEZ_SST [mil]
  round 200 hole 100 mask+5: 1(-1,0)
VISHAY_CMCHK_ICM4743 [mm]
  rect 4.5x2.7 smd: 1(-4.75,2.6) 2(4.75,2.6) 3(4.75,-2.6) 4(-4.75,-2.6)
  silkscreen extent -2.15,-5.2 2.15,5.2
WAFER_PADS_REV4 [mil]
  rect 62x62 / inner round 62 / far side rect 62x62 hole 38 mask+1.5: A1(3100,0) A10(2200,0) A20(1200,0) A31(100,0) B1(3100,100) B10(2200,100) B20(1200,100) B31(100,100) C0(2300,-100) D0(2300,-200)
  round 62 hole 38 mask+1.5: A2(3000,0) A3(2900,0) A4(2800,0) A5(2700,0) A6(2600,0) A7(2500,0) A8(2400,0) A9(2300,0) A11(2100,0) A12(2000,0) A13(1900,0) A14(1800,0) A15(1700,0) A16(1600,0) A17(1500,0) A18(1400,0) A19(1300,0) A21(1100,0) A22(1000,0) A23(900,0) A24(800,0) A25(700,0) A26(600,0) A27(500,0) A28(400,0) A29(300,0) A30(200,0) A32(0,0) B2(3000,100) B3(2900,100) B4(2800,100) B5(2700,100) B6(2600,100) B7(2500,100) B8(2400,100) B9(2300,100) B11(2100,100) B12(2000,100) B13(1900,100) B14(1800,100) B15(1700,100) B16(1600,100) B17(1500,100) B18(1400,100) B19(1300,100) B21(1100,100) B22(1000,100) B23(900,100) B24(800,100) B25(700,100) B26(600,100) B27(500,100) B28(400,100) B29(300,100) B30(200,100) B32(0,100) C1(2200,-100) C2(2100,-100) C3(2000,-100) C4(1900,-100) C5(1800,-100) C6(1700,-100) C7(1600,-100) C8(1500,-100) C9(1400,-100) C10(1300,-100) C11(1200,-100) C12(1100,-100) C13(1000,-100) C14(900,-100) C15(800,-100) C16(700,-100) C17(600,-100) C18(500,-100) C19(400,-100) D1(2200,-200) D2(2100,-200) D3(2000,-200) D4(1900,-200) D5(1800,-200) D6(1700,-200) D7(1600,-200) D8(1500,-200) D9(1400,-200) D10(1300,-200) D11(1200,-200) D12(1100,-200) D13(1000,-200) D14(900,-200) D15(800,-200) D16(700,-200) D17(600,-200) D18(500,-200) D19(400,-200)
  round 220 hole 160 mask+5: MTH1(-599.61,-200) MTH2(0,-200) MTH3(3150,-199.21) MTH4(100,3175) MTH5(3000,3175) MTH6(3148.03,5081.89) MTH7(-599.61,5081.89)
  silkscreen extent -941,-553 3297,5217
Y_CAP_KEMET [mm]
  round 1.5 hole 1.1: 1(-7.25,0) 2(-5.1,0) 3(5.1,0) 4(7.25,0)
  silkscreen extent -9,-2.6 9,2.6

## Via types
v1: diameter 30, hole 20, Primary Component Side to Secondary Component Side, 910 vias
v2: diameter 50, hole 28, Primary Component Side to Secondary Component Side, 2 vias

## Nets (pads, with @x,y where several pads share a name; then routed paths per layer and width w, separated by ;. In a path a pad name is that pad's centre, name@x,y a point inside that pad or via, vN(x,y) a via of type N, cw(c..) or ccw(c..) an arc to the next point about the centre after c; other vN are vias at no path point)
$$$3436: R22.2 U13.14 | length 277.7
  Primary Component Side w11: U13.14@77,2031.25 127,1981.25 200,1981.25 252.97,2034.22 R22.2@312.01,2034.22
$$$3438: R21.2 U13.13 | length 277.5
  Primary Component Side w11: U13.13@77,1931.25 127,1881.25 193.75,1881.25 242.67,1930.17 R21.2@313.57,1930.17
$$$3441: R20.2 U13.12 | length 276.5
  Primary Component Side w11: U13.12@77,1831.25 127,1781.25 207.26,1781.25 253.78,1827.77 R20.2@313.57,1827.77
$$$3443: R19.2 U13.11 | length 275.4
  Primary Component Side w11: U13.11@77,1731.25 127,1681.25 207.33,1681.25 252.95,1726.87 R19.2@312.81,1726.87
$$$3445: R18.2 U13.10 | length 272.3
  Primary Component Side w11: U13.10@77,1631.25 127,1581.25 208.53,1581.25 250.25,1622.97 R18.2@311.31,1622.97
$$$3447: R17.2 U13.9 | length 269.8
  Primary Component Side w11: U13.9@77,1531.25 127,1481.25 208.98,1481.25 248.29,1520.57 R17.2@309.8,1520.57
$$$3556: R11.1 U13.16 | length 283
  Primary Component Side w11: U13.16@77,2231.25 127,2181.25 200,2181.25 262.13,2243.38 R11.1@313.53,2243.38
$$$3941: R10.1 U17.1 | length 136.5
  Primary Component Side w11: U17.1@1439.96,1109.51 R10.1@1534.69,1014.78
  Primary Component Side w12: U17.1@1439.48,1109.51 U17.1@1439.96,1109.51 ; R10.1@1533.68,1013.77 1534.69,1013.77 R10.1@1534.69,1014.78
$$$9819: R9.1 U3.7 | length 214.6
  Secondary Component Side w30: U3.7@4307.09,2500 4307.09,2386.88 R9.1@4378.88,2315.09
$$$10930: D6.2 R10.2 | length 106.9
  Primary Component Side w11: D6.2@1443.75,898.03 1443.75,896.19 1483.77,896.19 1487.68,892.27 1533.68,892.27 R10.2@1533.68,878.77
$$$19412: C3.1 R43.2 R44.1 U6.2 | length 363.8
  Primary Component Side w23.62: U6.2@2724.26,1944.45 2724.26,1894.49 2738.81,1879.94 2738.81,1838.02 C3.1@2752,1838.02
  Primary Component Side w29.53: R44.1@2537.5,1798.75 R43.2@2643.75,1798.75 2643.75,1812.37 2658.99,1813.99 2683.02,1838.02 C3.1@2752,1838.02
$$$19426: C5.2 R39.2 R42.1 U6.1 | length 353.1
  Primary Component Side w20: C5.2@2596.77,1941.53 2674.26,1941.53 U6.1@2674.26,1944.45
  Primary Component Side w30: R42.1@2418.38,1792.8 2418.38,1848.69 2470.99,1901.3 R39.2@2491.56,1901.3 2556.54,1901.3 C5.2@2596.77,1941.53
$$$19729: R1.2 US2.4 | length 181.6
  Primary Component Side w20: US2.4@5168.75,8462.5 5218.75,8462.5 5280,8401.25 R1.2@5280,8356.25
$$$19730: R6.2 US3.2 US3.3 | length 154.5
  Primary Component Side w12: US3.2@4275,8625 US3.3@4325,8625 4325,8521.91 R6.2@4323.56,8521.91
$$$19731: R3.2 U2.1 | length 109
  Primary Component Side w20: U2.1@4931.25,8400 5012.5,8400 5031.25,8418.75 R3.2@5031.25,8420
$$$19732: JP6.2 R32.1 | length 161.4
  Primary Component Side w20: JP6.2@5606.25,8856.25 5712.5,8856.25 5725,8843.75 R32.1@5762.5,8843.75
$$$19733: R3.1 US2.1 | length 163.4
  Primary Component Side w20: R3.1@5031.25,8550 5093.75,8612.5 US2.1@5168.75,8612.5
$$$19736: C5.1 R39.1 U6.8 | length 255
  Primary Component Side w20: C5.1@2596.77,2031.53 2674.26,2109.02 U6.8@2674.26,2144.45
  Primary Component Side w30: R39.1@2491.56,2036.3 2491.56,2031.53 C5.1@2596.77,2031.53
$$$19857: C8.1 U6.6 | length 185.9
  Primary Component Side w12: U6.6@2774.26,2144.45 2774.26,2169.45 2804.81,2200 2909,2200 C8.1@2909,2186.5
$$$19881: C8.2 R40.2 | length 176.4
  Primary Component Side w12: C8.2@2909,2051.5 2959,2101.5 2959,2136.5 R40.2@3009,2186.5
$$$20126: C2.2 R5.2 US3.15 | length 238.5
  Primary Component Side w11: R5.2@4131.38,8921.28 4131.38,8922.46 C2.2@4242.46,8922.46 4263.65,8922.46 4266.96,8902.96 4275,8894.92 US3.15@4275,8821
$$$20185: C2.1 US3.14 | length 108.9
  Primary Component Side w11: US3.14@4325,8821 4325,8922.46 C2.1@4332.46,8922.46
$$$24979: R23.1 U13.15 | length 279.5
  Primary Component Side w11: U13.15@77,2131.25 127,2081.25 206.25,2081.25 262.5,2137.5 R23.1@312.5,2137.5
$$$25131: M2.4 U14.8 | length 257
  Primary Component Side w12: M2.4@2679.13,2619.09 2689.27,2619.09 2689.27,2600 2714.27,2575 2820.75,2575 2833.25,2562.5 U14.8@2833.25,2494.27
$$$25132: C43.1 R26.2 U14.1 | length 1.2
  Primary Component Side w12: C43.1@2580.94,2259.15 C43.1@2582.16,2259.15
$$$25133: R29.2 U14.2 | length 174.1
  Primary Component Side w10: R29.2@2586.25,2143.75 2642.5,2200 2686.55,2200 2705.3,2218.75 U14.2@2705.3,2242.75
$$$25134: C45.2 U14.12 | length 193.7
  Primary Component Side w12: C45.2@2582.73,2565.75 2582.73,2566.59 2683.44,2566.59 2731.28,2518.75 U14.12@2731.28,2494.27
$$$25135: C44.2 U14.13 | length 164.4
  Primary Component Side w12: C44.2@2582.12,2467.2 2582.12,2456.25 2692.42,2456.25 2704.92,2468.75 U14.13@2704.92,2494.27
$$$31333: RN9.7 U1.10 | length 252.9
  Primary Component Side w11: RN9.7@953.08,2013.48 953.08,1984.42 962.5,1975 1000,1975 1031.25,1943.75 1031.25,1889.25 1023.25,1881.25 U1.10@960.25,1881.25
$$$31334: C12.2 R14.2 U1.7 | length 322.9
  Primary Component Side w11: R14.2@1113.71,2009.48 1087.5,1983.27 1087.5,1900 1106.25,1881.25 U1.7@1156.25,1881.25 1220.29,1881.25 1237.11,1898.07 1256.61,1905.14 C12.2@1256.61,1922.57
$$$31335: C11.2 R13.2 U1.15 | length 214.6
  Primary Component Side w11: R13.2@756.68,1608.9 859.06,1608.9 C11.2@859.06,1611.96 878.35,1631.25 U1.15@960.25,1631.25
$$$31336: C12.1 U1.6 | length 101.7
  Primary Component Side w11: U1.6@1156.25,1831.25 C12.1@1256.61,1831.25
  Primary Component Side w12: C12.1@1256.61,1831.25 C12.1@1256.61,1832.57
$$$31337: R16.2 U10.1 | length 105.5
  Primary Component Side w11: U10.1@2749.89,5204.69 2757.4,5204.69 R16.2@2757.4,5106.71
$$$31338: U1.9 U1.13 | length 343.2
  Primary Component Side w11: U1.13@960.25,1731.25 925.75,1731.25 863.25,1793.75 863.25,1907 887.5,1931.25 U1.9@960.25,1931.25
$$$31339: C11.1 U1.14 | length 109.8
  Primary Component Side w11: C11.1@859.06,1701.96 879.77,1681.25 U1.14@960.25,1681.25
$$$31409: C10.1 RN9.6 U1.2 U1.3 U1.11 | length 861.2
  Primary Component Side w11: RN9.6@903.08,2013.48 903.08,2016.48 936.6,2050 1017.37,2050 1056.25,2011.12 1056.25,1843.75 1043.75,1831.25 ; U1.11@960.25,1831.25 1043.75,1831.25 ; U1.2@1156.25,1631.25 U1.3@1156.25,1681.25 1093.75,1681.25 1043.75,1731.25 1043.75,1831.25
  Primary Component Side w12: U1.3@1156.25,1681.25 1260.38,1681.25 C10.1@1260.38,1700.45
$$$32455: C49.1 U16.4 | length 79.6
  Primary Component Side w11: U16.4@6027.76,5218.85 6101.69,5218.85 C49.1@6101.69,5213.15
+24VDC: C60.1 C60.2 C61.3 C61.4 REG1.1 S1.1 U45.1
  other v1: 481.25,606.25 575,612.5 262.5,625 393.75,625 68.75,631.25 292,685 651,687 725,687.5 493.75,693.75 881.25,693.75 68.75,762.5 262.5,762.5 653,768 381.25,775 725,781.25 881.25,793.75 931,853 1088,853 923.66,1080.01 1103.23,1080.01
+24VDC_CMCHK: C41.1 D2.2 L1.2 T1.1
  other v1: 2113,753 2065,800 2173,801 2042.01,906.72 1998,963 1933.21,1015.53 1996,1025 1988,1093 1925.74,1094.39
+24VDC_DIODE: C54.1 D1.1 L1.1
  other v1: 1440,480 1486,530 1402.29,544.51 1689,587 1455.56,593.24 1549,598 1624,605 1592,654 1701,661 1565.5,714.51
+24VDC_SW: D1.2 D6.1 D7.2 S1.2
  other v1: 1206.73,593.73 1218.75,812.5 1284,828 1178,861 1381.34,908.46 1368.31,1066.71 1179.24,1079.06
+V: J16.A4 J16.B4 J16.C4 | length 200
  Primary Component Side w12: J16.C4@5878.5,3218.5 J16.B4@5978.5,3218.5 J16.A4@6078.5,3218.5
-V: J16.A5 J16.B5 J16.C5 | length 200
  Primary Component Side w12: J16.C5@5878.5,3118.5 J16.B5@5978.5,3118.5 J16.A5@6078.5,3118.5
/FLTB1: R27.2 U11.58 U14.4 | length 4719.8
  Primary Component Side w11: v1(5058.04,3786.05) 5187.5,3915.51 5187.5,4606.25 5387.5,4806.25 5387.5,4887.5 5324,4951 U11.58@5238.45,4951
  Primary Component Side w12: U14.4@2756.48,2242.75 2756.48,2359.73 2784.25,2387.5 2879.78,2387.5 R27.2@2924.02,2343.27 3010.3,2429.55 3010.3,2500 3085.3,2575 3181.25,2575 3331.25,2725 3331.25,2866 3590.25,3125 3887.5,3125 4062.5,3300 4062.5,3521.57 v1(4062.39,3533.09)
  Secondary Component Side w11: 4337.5,3731.25 5003.24,3731.25 v1(5058.04,3786.05)
  Secondary Component Side w12: v1(4062.39,3533.09) 4104.3,3575 4131.25,3575 4287.5,3731.25 4337.5,3731.25
/NMI_DS1231: U11.114 U20.7 | length 9000.7
  Primary Component Side w11: v1(910.73,3283.29) 910.73,3316.98 912.5,3318.75 912.5,3781.25 1662.5,4531.25 2968.75,4531.25 v1(3031.25,4593.75) ; U11.114@4971.15,5947.2 4971.15,6123.13 4999.66,6151.64 4999.66,6200.34 v1(4975,6225)
  Secondary Component Side w11: v1(910.73,3283.29) 910.73,3175 793.75,3058.02 793.75,2456.25 1006.25,2243.75 1231.25,2243.75 1442.48,2032.52 1447.43,2032.52 U20.7@1675.98,1803.97 ; v1(3031.25,4593.75) 3100.23,4662.73 3100.23,4750 3600,5249.77 3600,5987.5 3637.5,6025 3637.5,6529 3664.75,6556.25 3862.5,6556.25 4200,6218.75 4481.25,6218.75 4537.5,6275 4925,6275 v1(4975,6225)
/NVRAM_RST: U11.140 U16.1 | length 4245
  Primary Component Side w11: v1(4249.9,6274.83) 4249.9,6275.68 4287.33,6275.68 4458.95,6104.06 U11.140@4458.95,5947.2 ; v1@5875,5297.52 v1(5877.21,5293.88) 5879.17,5295.83 5881.35,5293.65 U16.1@5922.76,5293.65
  Secondary Component Side w11: v1(4249.9,6274.83) 4200,6324.73 4200,6412.5 4156.25,6456.25 4156.25,6699 4237.5,6780.25 4237.5,6906.25 4306.25,6975 4481.25,6975 4537.5,6918.75 4725,6918.75 4800,6843.75 4888.59,6843.75 4919.84,6875 5250,6875 5293.75,6831.25 5468.75,6831.25 5556.25,6743.75 5556.25,6643.75 5606.25,6593.75 5606.25,5787.5 5718.75,5675 5718.75,5487.5 5877.21,5329.04 v1(5877.21,5293.88)
A0: RN13.7 S2.6 U11.79 | length 2285.8
  Primary Component Side w11: U11.79@5238.45,5364.7 5487.5,5364.7 5562.48,5439.68 v1(5562.48,5557.78) ; S2.6@5368.75,6512.5 5562.5,6512.5 ; v1(5562.5,6464.5) 5562.5,6512.5 ; RN13.7@5692.58,7118.82 5693.75,7119.75 5693.75,7081.25 5625,7012.5 5625,6575 5562.5,6512.5
  Secondary Component Side w11: v1(5562.48,5557.78) 5561.97,5557.78 5561.97,6464.5 v1(5562.5,6464.5)